# Altium PCB SW.PcbDoc (part 1 of 2)
Units mm, origin at the board's own origin, x right, y up, seen from the top; angles counter-clockwise.
Board outline 130 x 71 mm, 4 copper layers (Top Layer, Mid Layer 1, Mid Layer 2, Bottom Layer), stack 0.97 mm thick; 152 components, 272 nets, 858 pads, 548 vias.
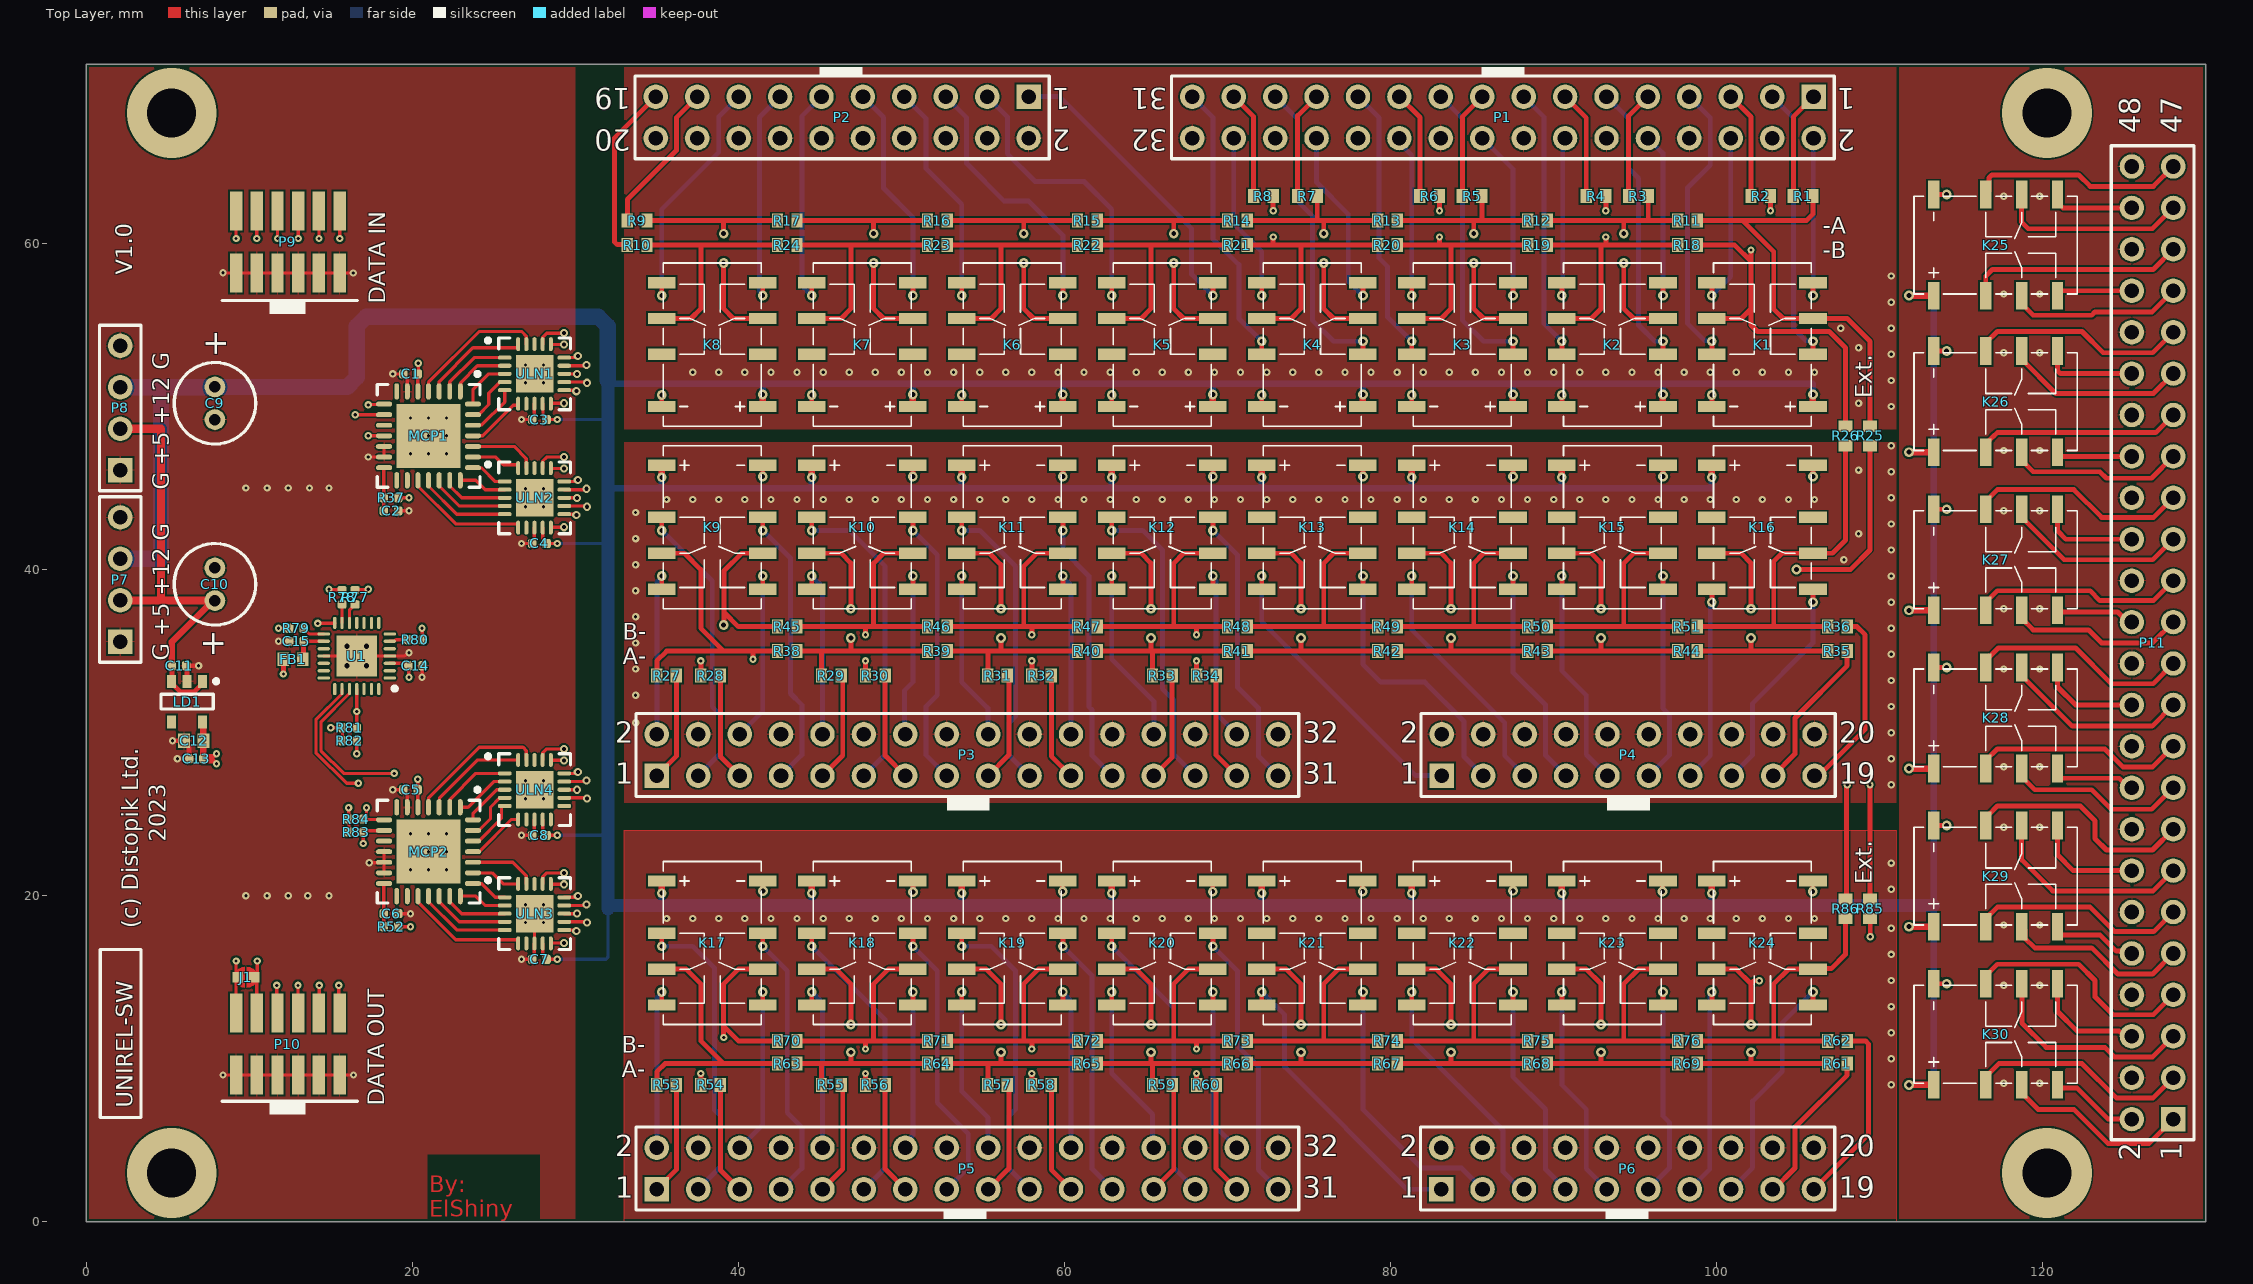
[diagram p0: Top Layer view]
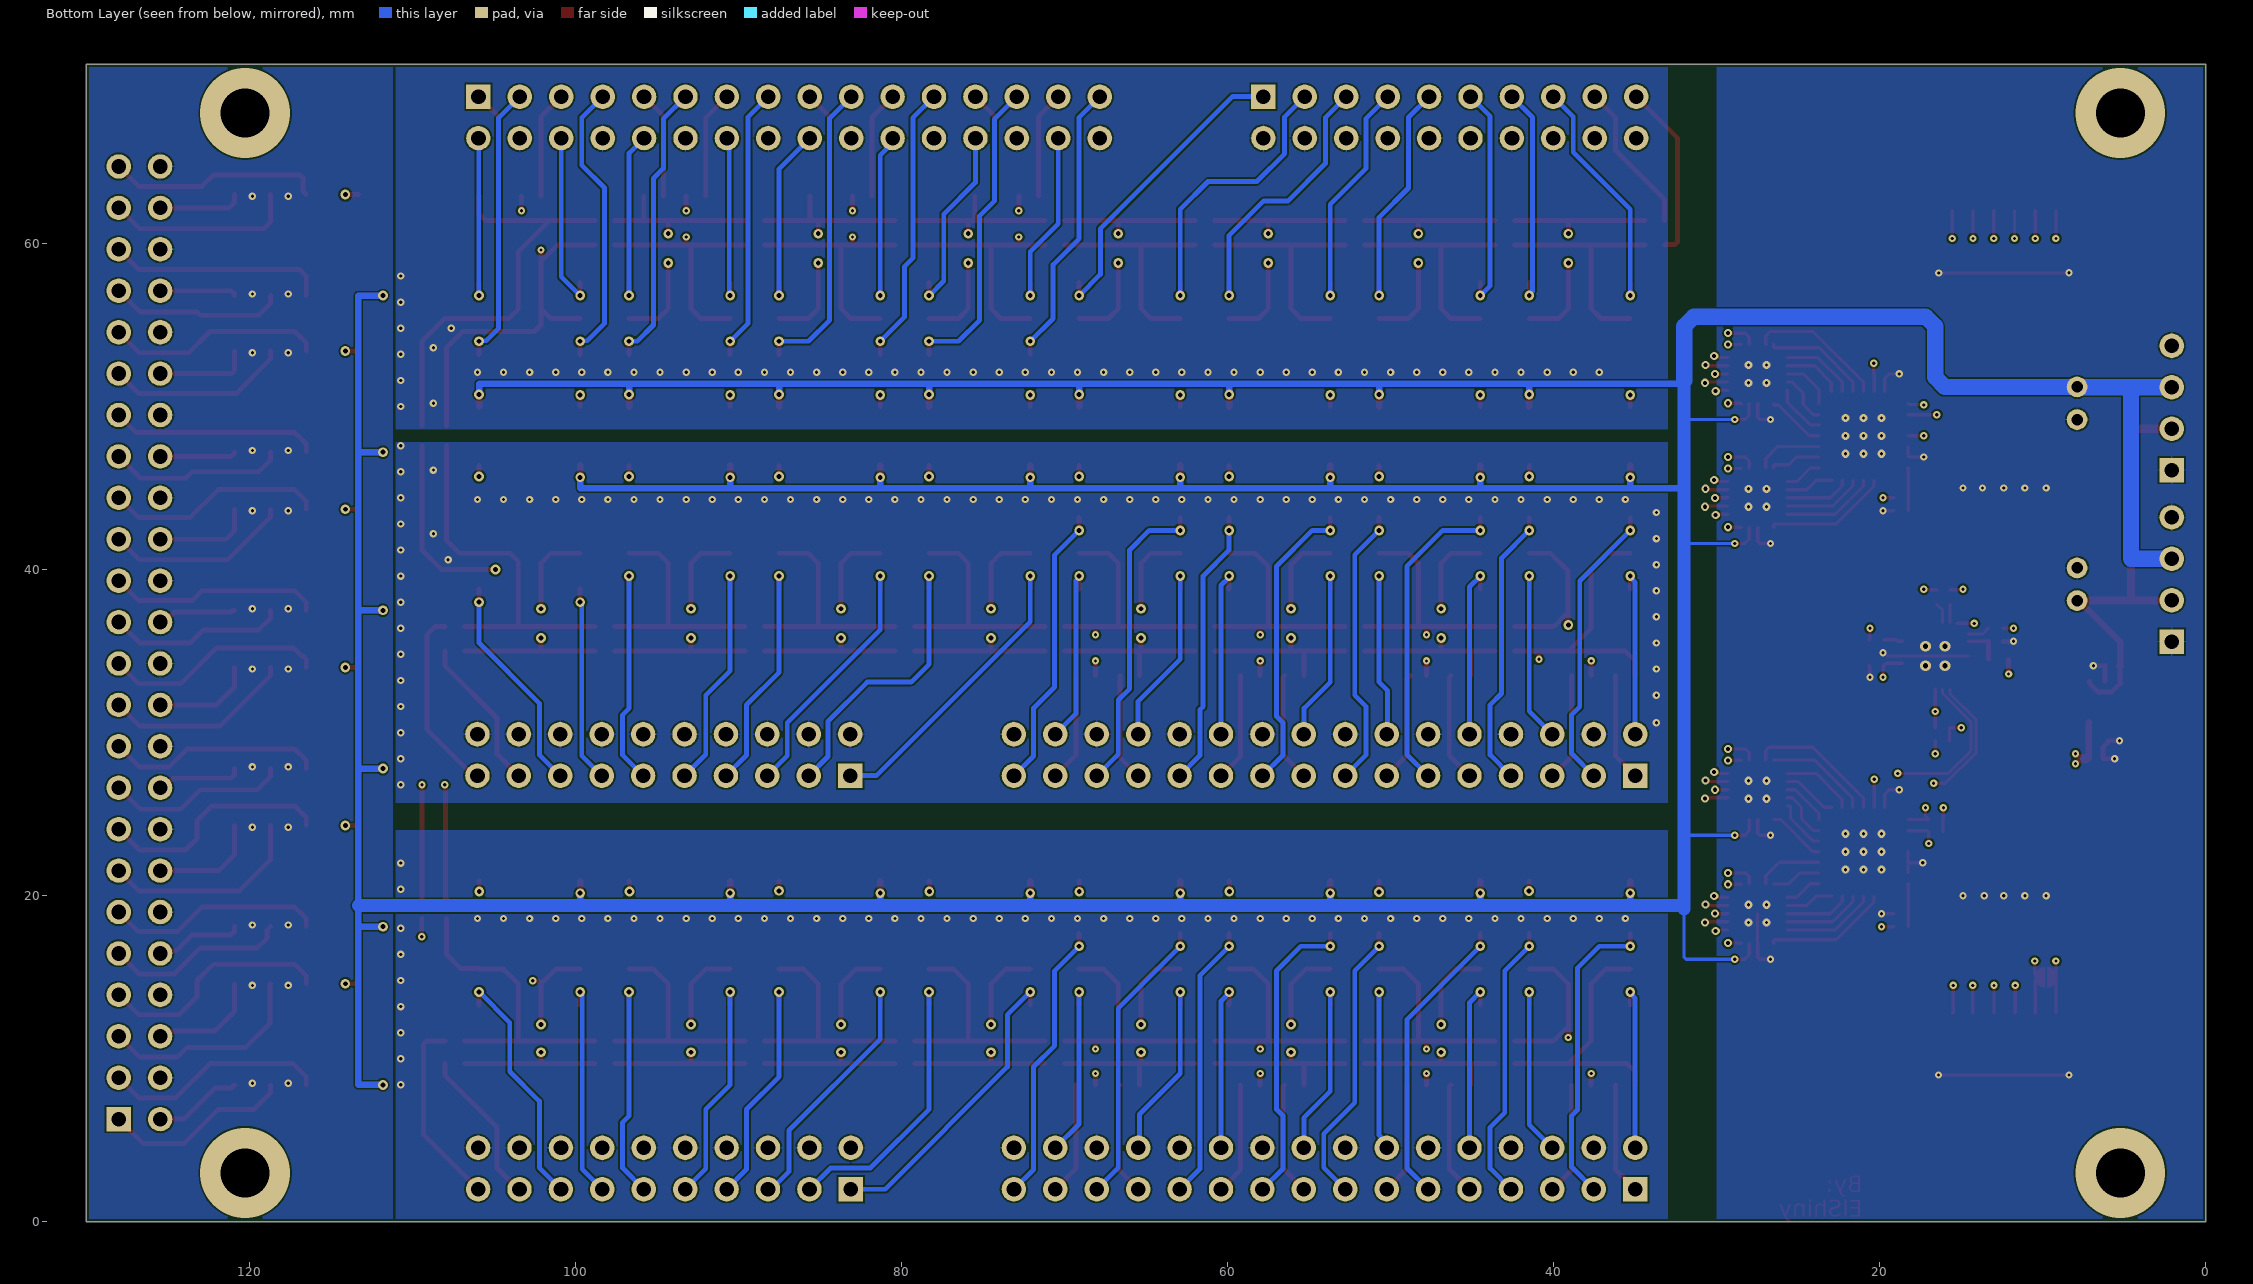
[diagram p1: Bottom Layer view, seen from below]
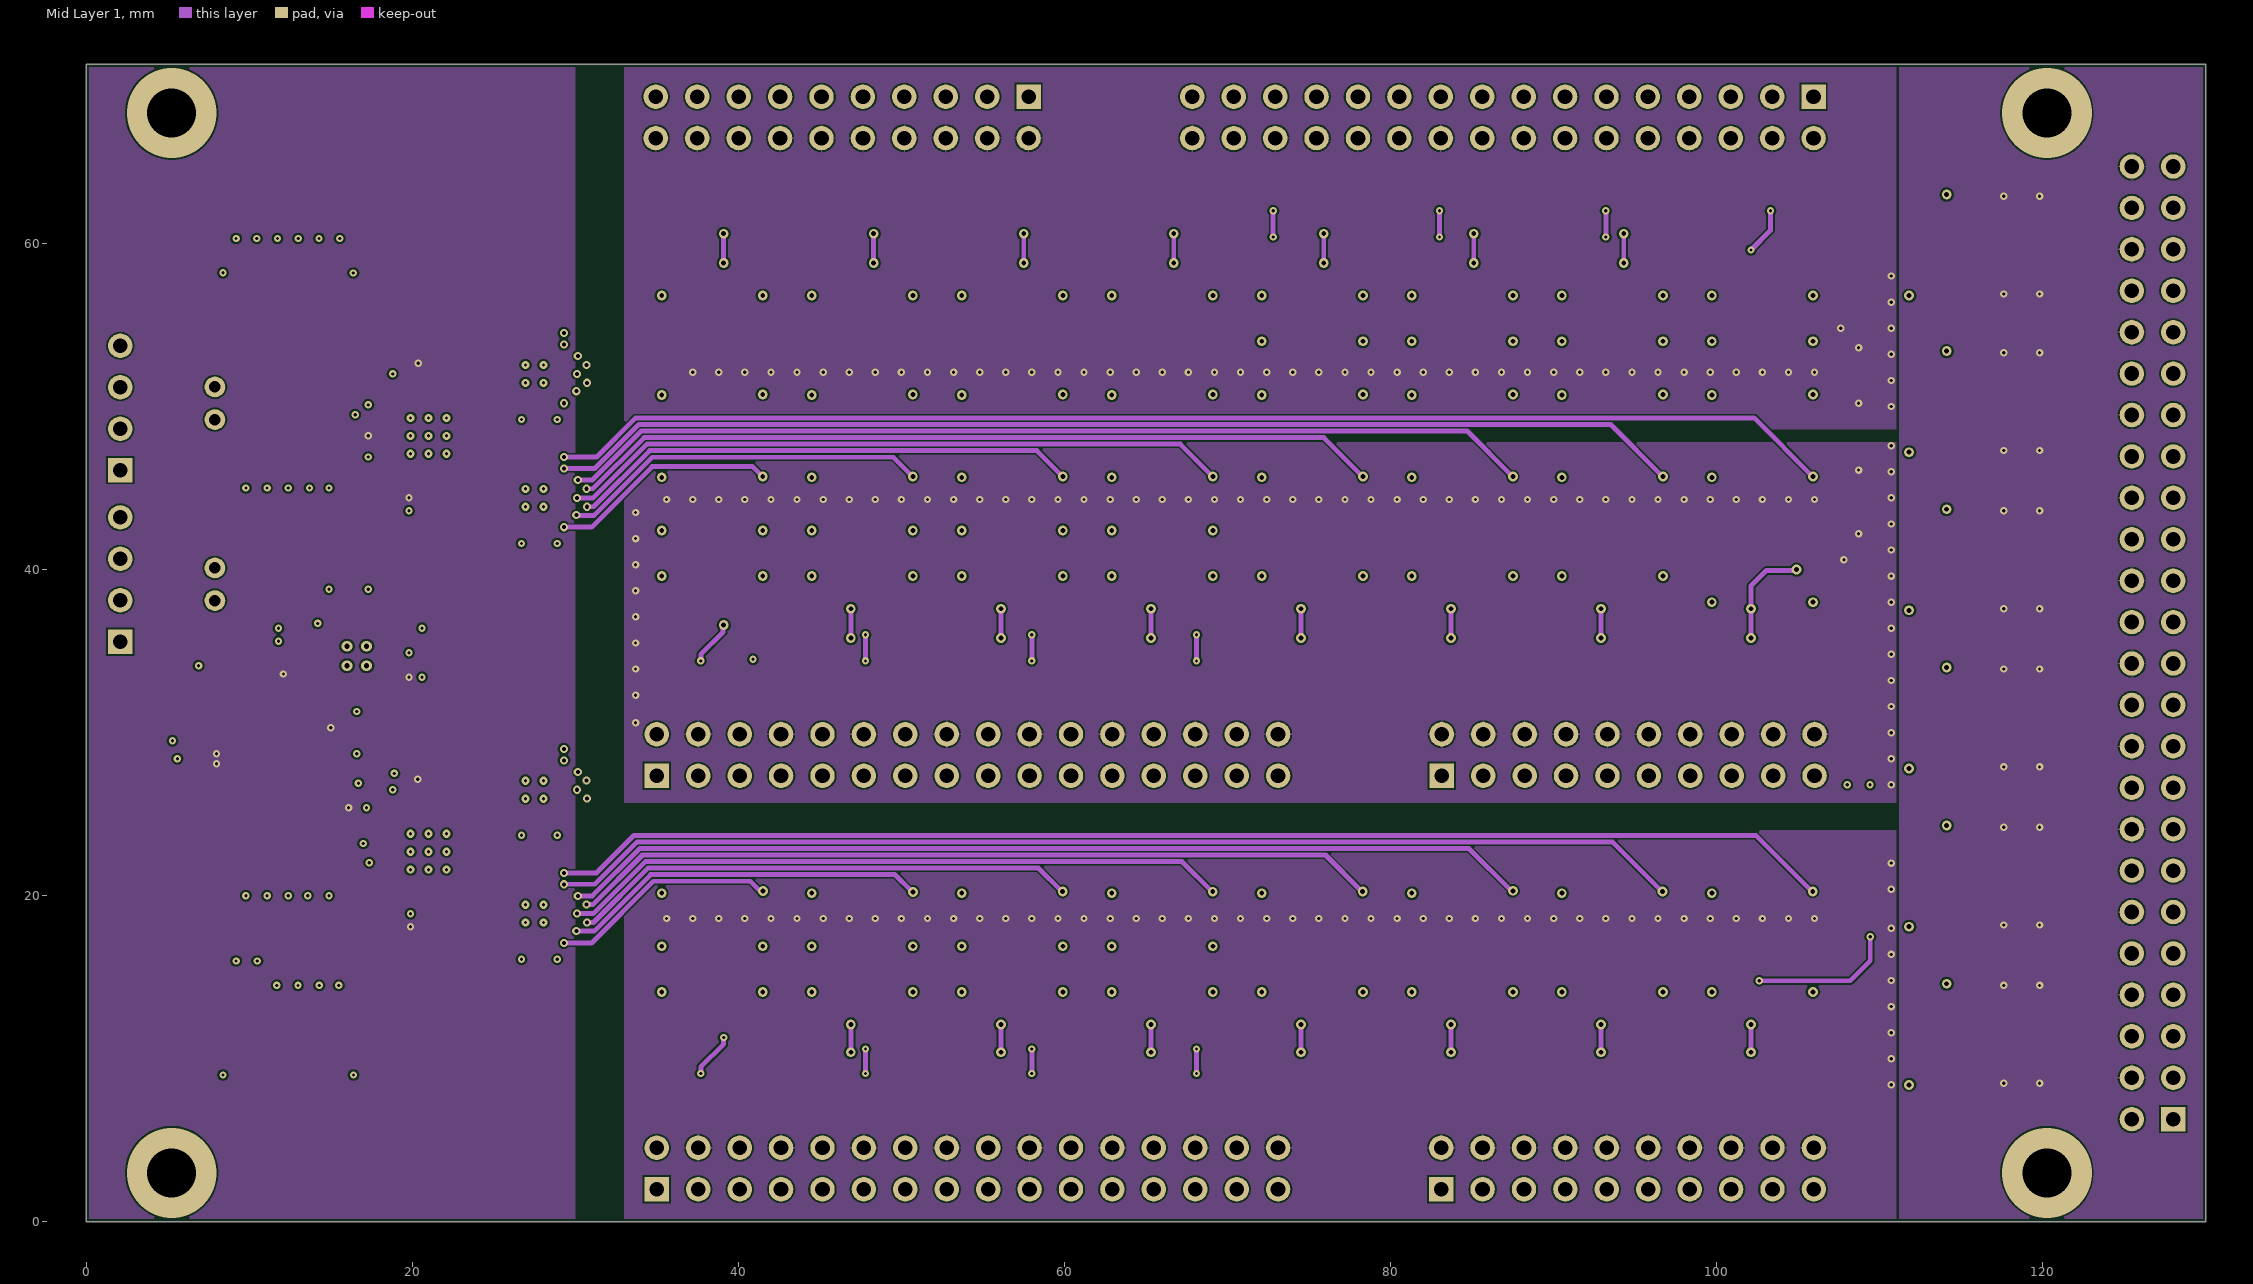
[diagram p2: Mid Layer 1]
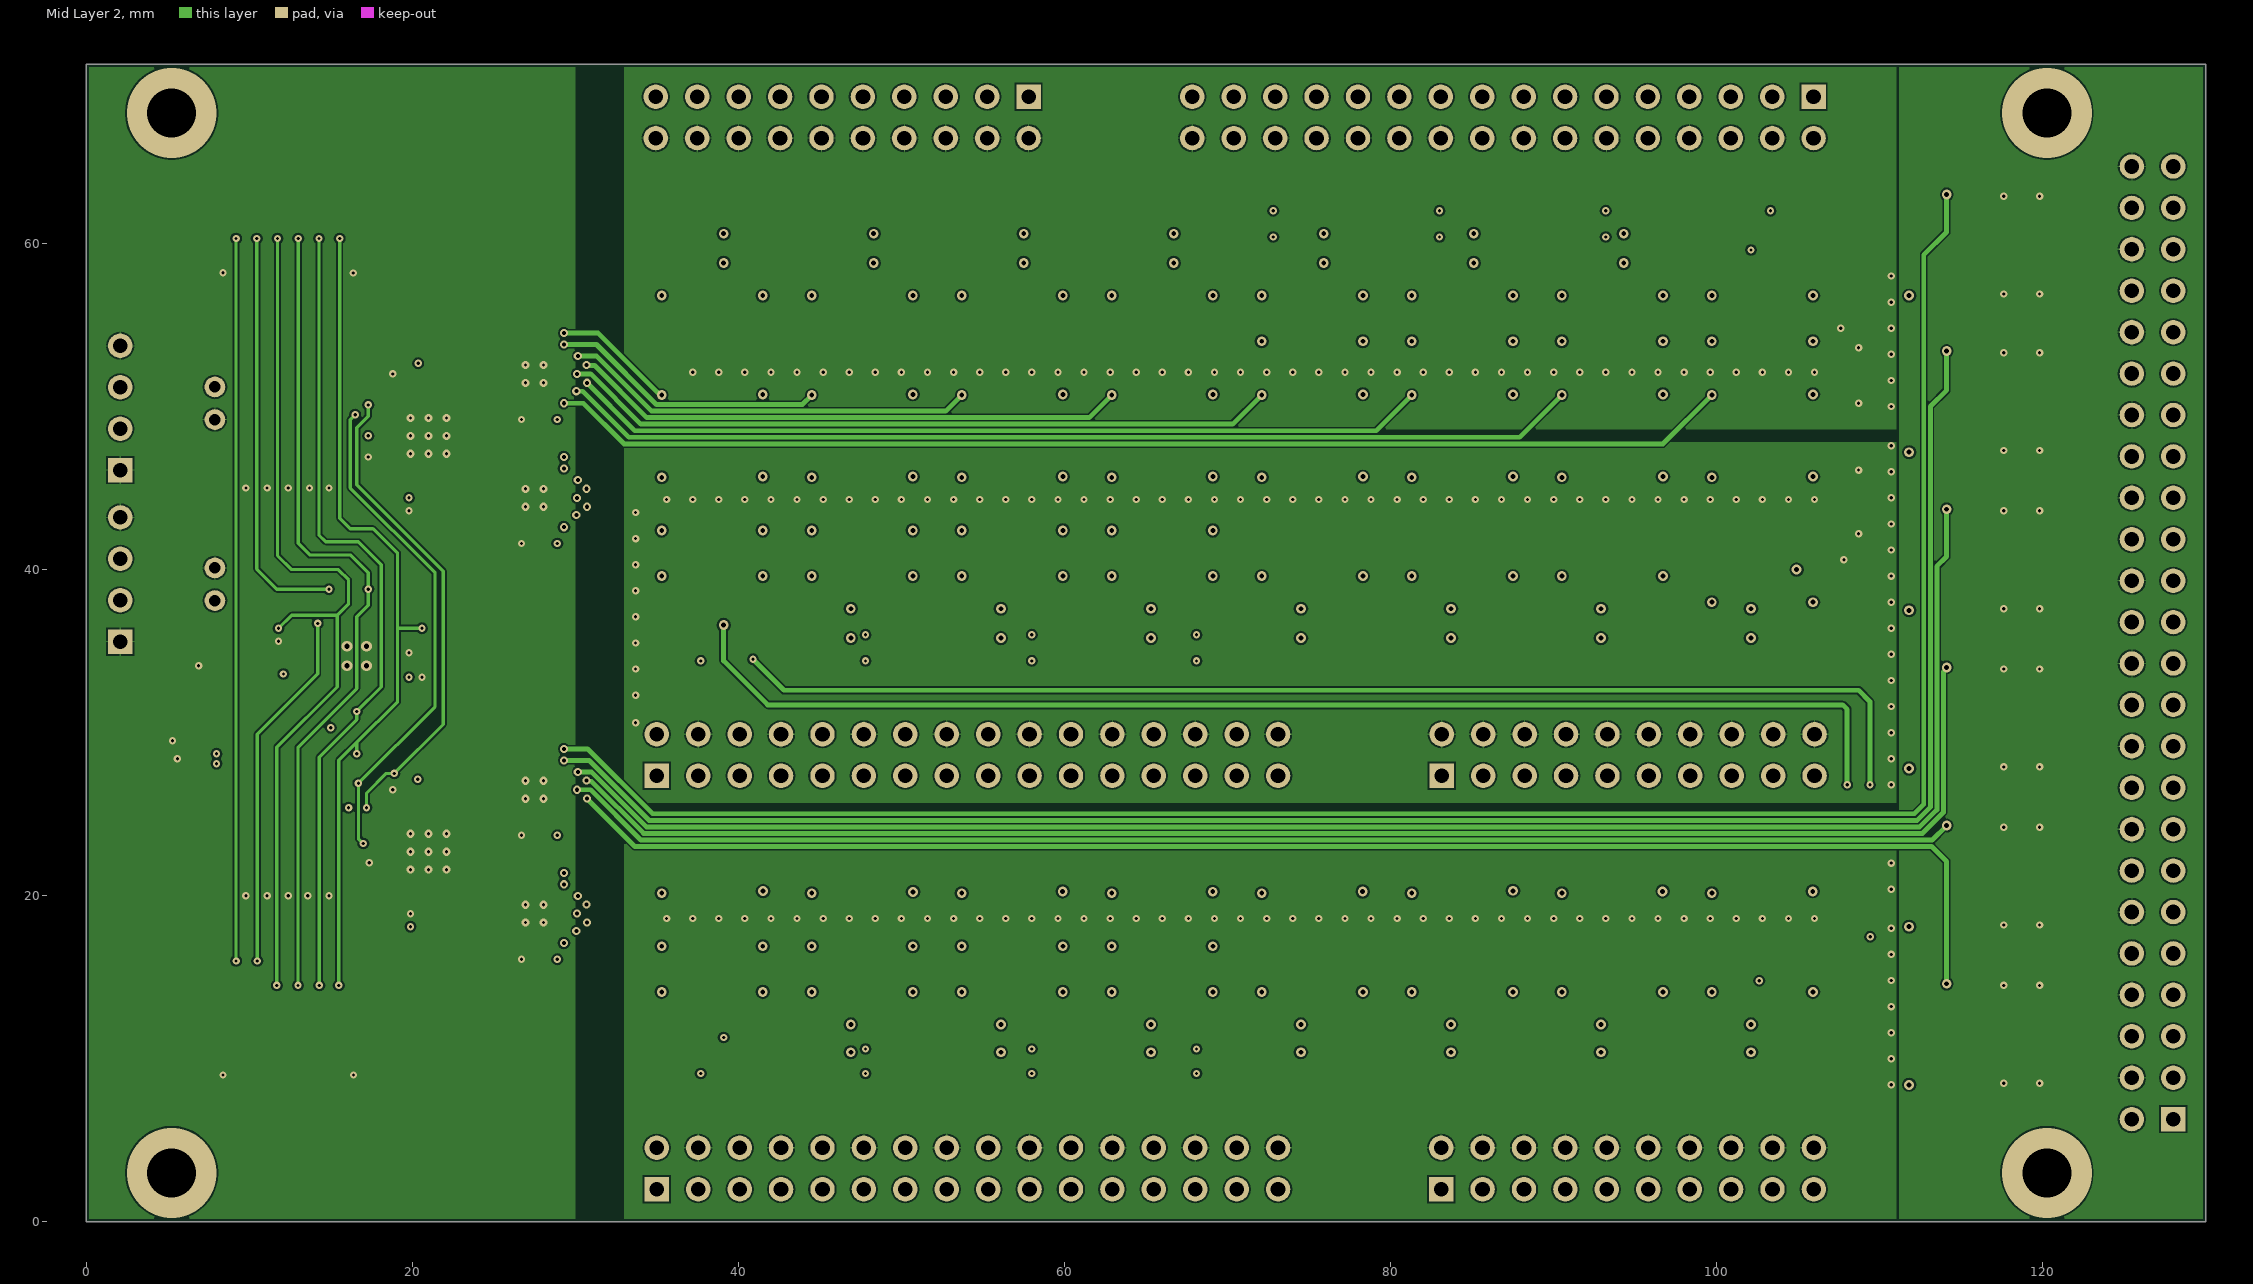
[diagram p3: Mid Layer 2]
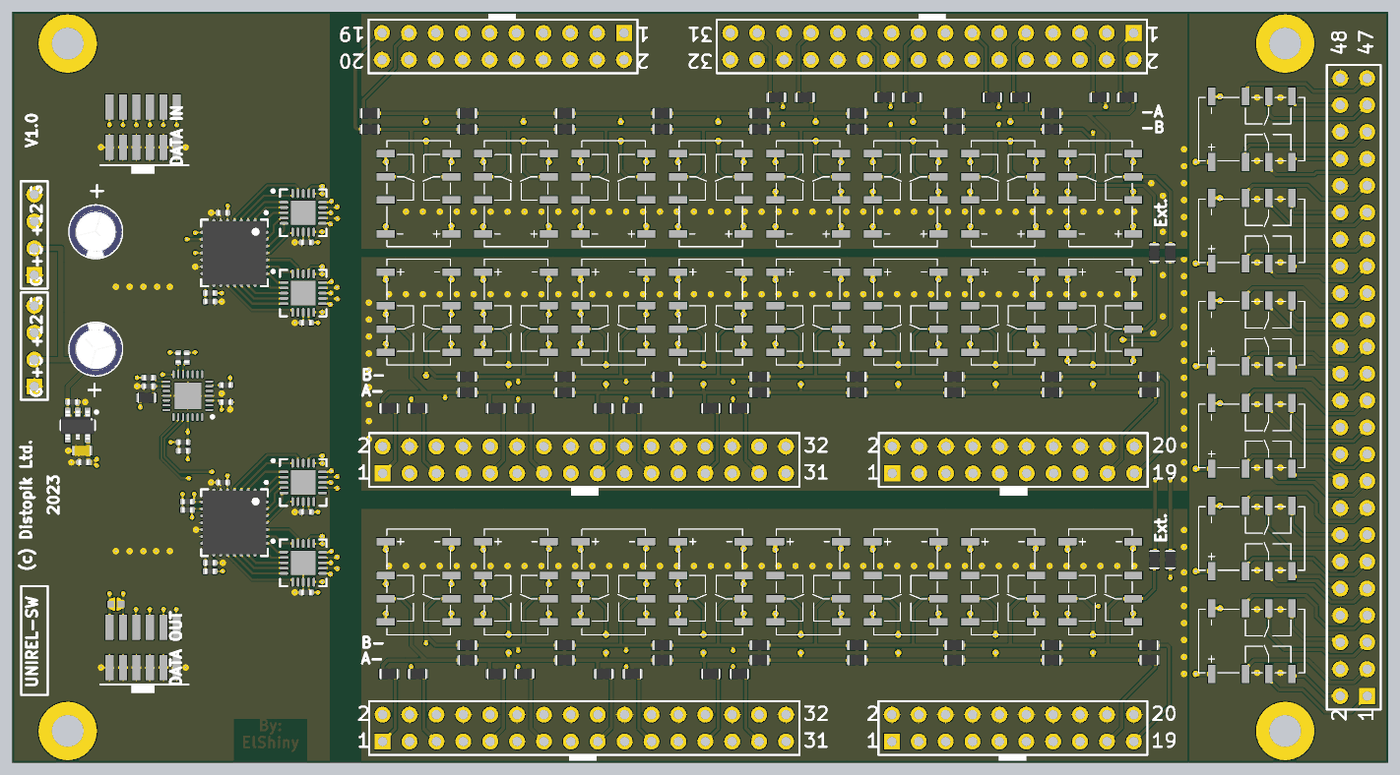
[diagram p5: 3D render of the assembled board from above, using the file's embedded part models]

## Layer stack, top to bottom
Top Solder: solder mask 0.0127, Solder Resist, Dk 3.8
Top Layer: signal copper 0.035
Dielectric 1: prepreg 0.1, 2313, Dk 4.05
Mid Layer 1: signal copper 0.0175
Core: core 0.665, FR-4, Dk 4.5
Mid Layer 2: signal copper 0.0175
Dielectric 2: prepreg 0.1, 2313, Dk 4.05
Bottom Layer: signal copper 0.035
Bottom Solder: solder mask 0.0127, Solder Resist, Dk 3.8

## Board outline
0,0 0,71 130,71 130,0

## Design rules (kind name [scope] priority, off if disabled: settings)
BoardOutlineClearance [All] p1: gap=0.2 ignorepadtopadclearanceinfootprint=FALSE
Clearance [All] p1: gap=0.102 ignorepadtopadclearanceinfootprint=FALSE except(0.127: Arc-Via Track-Via SMDPad-Via THPad-Via Via-Via Via-Fill Via-Poly Via-Region Via-Text; 0.25: Arc-Hole Track-Hole SMDPad-Hole THPad-Hole Via-Hole Fill-Hole Poly-Hole Region-Hole Text-Hole)
ComponentClearance [All] p1: gap=0.102 collisioncheckmode=3 verticalgap=0.102 showdistances=TRUE
DiffPairsRouting [All] p1: maxlimit=0.102 minlimit=0.102 mostfreqgap=0.102 toplayer_minwidth=0.102 toplayer_maxwidth=1816.048 toplayer_prefwidth=0.102 midlayer1_minwidth=0.102 midlayer1_maxwidth=1816.048 midlayer1_prefwidth=0.102 midlayer2_minwidth=0.102 midlayer2_maxwidth=1816.048 midlayer2_prefwidth=0.102 bottomlayer_minwidth=0.102 bottomlayer_maxwidth=1816.048 bottomlayer_prefwidth=0.102 maxuncoupledlength=12.7
Height [All] p1: minheight=0 maxheight=1816.048 prefheight=12.7
HoleSize [All] p1: absolutevalues=TRUE maxlimit=6.3 minlimit=0.2 maxpercent=80.000 minpercent=20.000
HoleToHoleClearance [All] p1: gap=0.25 allowstackedmicrovias=FALSE
MinimumAnnularRing [All] p1: minimumring=0.076
MinimumSolderMaskSliver [All] p1: minsoldermaskwidth=0
PlaneClearance [All] p1: clearance=0.102
PlaneConnect PlaneConnectPowerPads [InPadClass('PowerPads')] p1: planeconnectstyle=Direct reliefexpansion=0.508 reliefentries=4 reliefconductorwidth=0.254 reliefairgap=0.254
PlaneConnect [All] p2: pad.planeconnectstyle=Relief pad.reliefexpansion=0.3 pad.reliefentries=4 pad.reliefconductorwidth=0.102 pad.reliefairgap=0.102 via.planeconnectstyle=Direct via.reliefexpansion=0.3 via.reliefentries=4 via.reliefconductorwidth=0.127 via.reliefairgap=0.127
PolygonConnect PolygonConnectPowerPads [All vs (InPadClass('PowerPads'))] p1: connectstyle=Direct reliefconductorwidth=0.254 reliefentries=4 polygonreliefangle="90 Angle" airgapwidth=0.254
PolygonConnect [All] p2: thpad.connectstyle=Relief thpad.reliefconductorwidth=0.102 thpad.reliefentries=4 thpad.polygonreliefangle="90 Angle" thpad.airgapwidth=0.102 smdpad.connectstyle=Relief smdpad.reliefconductorwidth=0.102 smdpad.reliefentries=4 smdpad.polygonreliefangle="90 Angle" smdpad.airgapwidth=0.102 via.connectstyle=Direct via.reliefconductorwidth=0.127 via.reliefentries=4 via.polygonreliefangle="90 Angle" via.airgapwidth=0.127
RoutingVias [All] p1: holewidth=0.2 width=0.45 viastyle="Through Hole" minholewidth=0.2 minwidth=0.45 maxholewidth=6.3 maxwidth=6.55
SilkToSilkClearance [All] p1: silktosilkclearance=0
SilkToSolderMaskClearance [IsPad] p1: minsilkscreentomaskgap=0.102 clearancetoexposedcopper=TRUE
SolderMaskExpansion [All] p1: expansion=0.075 istentingtop=FALSE
Width [All] p1: maxlimit=1816.048 minlimit=0.102 preferedwidth=0.102
20 further rules are at their usual default settings.

## Components (designator, comment, footprint, x,y, rotation, side; value= is the part's Value field where it differs from the comment)
C1 "100n" R1005_0402i_L 19.9,52 r0 top
C2 "100n" R1005_0402i_L 18.7,43.6 r180 top
C3 "100n" R1005_0402i_L 27.8,49.2 r180 top
C4 "100n" R1005_0402i_L 27.8,41.6 r180 top
C5 "100n" R1005_0402i_L 19.9,26.5 r0 top
C6 "100n" R1005_0402i_L 18.7,18.9 r180 top
C7 "100n" R1005_0402i_L 27.8,16.1 r180 top
C8 "100n" R1005_0402i_L 27.8,23.7 r180 top
C9 "C+" "C AlElko 5x11 R2" 7.9,50.2 r90 top
C10 "C+" "C AlElko 5x11 R2" 7.9,39.1 r270 top
C11 "100n" R1005_0402i_L 5.7,34.1 r0 top
C12 "1u" C1608_0603I_L 6.6,29.5 r180 top
C13 "100n" R1005_0402i_L 6.76,28.4 r180 top
C14 "100n" R1005_0402i_L 20.2,34.1 r0 top
C15 "100n" R1005_0402i_L 12.9,35.6 r180 top
FB1 "FERITTE BEAD" R1608_0603I_L 12.7,34.5 r0 top
J1 "Terminator" solderJumper 9.8,15 r0 top
K1 "DPDT" "AXICOM IM-G Relay" 102.8,53.8 r90 top locked
K2 "DPDT" "AXICOM IM-G Relay" 93.6,53.8 r90 top locked
K3 "DPDT" "AXICOM IM-G Relay" 84.4,53.8 r90 top locked
K4 "DPDT" "AXICOM IM-G Relay" 75.2,53.8 r90 top locked
K5 "DPDT" "AXICOM IM-G Relay" 66,53.8 r90 top locked
K6 "DPDT" "AXICOM IM-G Relay" 56.8,53.8 r90 top locked
K7 "DPDT" "AXICOM IM-G Relay" 47.6,53.8 r90 top locked
K8 "DPDT" "AXICOM IM-G Relay" 38.4,53.8 r90 top locked
K9 "DPDT" "AXICOM IM-G Relay" 38.4,42.6 r270 top locked
K10 "DPDT" "AXICOM IM-G Relay" 47.6,42.6 r270 top locked
K11 "DPDT" "AXICOM IM-G Relay" 56.8,42.6 r270 top locked
K12 "DPDT" "AXICOM IM-G Relay" 66,42.6 r270 top locked
K13 "DPDT" "AXICOM IM-G Relay" 75.2,42.6 r270 top locked
K14 "DPDT" "AXICOM IM-G Relay" 84.4,42.6 r270 top locked
K15 "DPDT" "AXICOM IM-G Relay" 93.6,42.6 r270 top locked
K16 "DPDT" "AXICOM IM-G Relay" 102.8,42.6 r270 top locked
K17 "DPDT" "AXICOM IM-G Relay" 38.4,17.1 r270 top locked
K18 "DPDT" "AXICOM IM-G Relay" 47.6,17.1 r270 top locked
K19 "DPDT" "AXICOM IM-G Relay" 56.8,17.1 r270 top locked
K20 "DPDT" "AXICOM IM-G Relay" 66,17.1 r270 top locked
K21 "DPDT" "AXICOM IM-G Relay" 75.2,17.1 r270 top locked
K22 "DPDT" "AXICOM IM-G Relay" 84.4,17.1 r270 top locked
K23 "DPDT" "AXICOM IM-G Relay" 93.6,17.1 r270 top locked
K24 "DPDT" "AXICOM IM-G Relay" 102.8,17.1 r270 top locked
K25 "DPDT" "AXICOM IM-G Relay" 117.1,59.9 r0 top locked
K26 "DPDT" "AXICOM IM-G Relay" 117.1,50.3 r0 top locked
K27 "DPDT" "AXICOM IM-G Relay" 117.1,40.6 r0 top locked
K28 "DPDT" "AXICOM IM-G Relay" 117.1,30.9 r0 top locked
K29 "DPDT" "AXICOM IM-G Relay" 117.1,21.2 r0 top locked
K30 "DPDT" "AXICOM IM-G Relay" 117.1,11.5 r0 top locked
LD1 "NCP115 3.3V" TSOP95P280X110-6L 6.2,31.9 r270 top
MCP1 "MCP32017" "MCP23017 QFN" 21,48.2 r270 top
MCP2 "MCP32017" "MCP23017 QFN" 21,22.7 r270 top
P1 "Header 16X2" HDR2X16 105.94,69 r180 top locked
P2 "Header 10X2" HDR2X10 57.8,69 r180 top locked
P3 "Header 16X2" HDR2X16 35,27.36 r0 top locked
P4 "Header 10X2" HDR2X10 83.14,27.36 r0 top locked
P5 "Header 16X2" HDR2X16 35,2 r0 top locked
P6 "Header 10X2" HDR2X10 83.1,2 r0 top locked
P7 "PWR" HDR1X4 2.1,35.58 r90 top
P8 "PWR" HDR1X4 2.1,46.1 r90 top
P9 "Input" "1.27mm SMD conn" 12.375,60.095 r180 top
P10 "Output" "1.27mm SMD conn" 12.375,10.905 r180 top
P11 "Header 24X2" HDR2X24 128,6.3 r90 top locked
R1 "R" R1608_0603I_L 105.3,62.9 r180 top
R2 "R" R1608_0603I_L 102.7,62.9 r180 top
R3 "R" R1608_0603I_L 95.2,62.9 r180 top
R4 "R" R1608_0603I_L 92.6,62.9 r180 top
R5 "R" R1608_0603I_L 85,62.9 r180 top
R6 "R" R1608_0603I_L 82.4,62.9 r180 top
R7 "R" R1608_0603I_L 74.9,62.9 r180 top
R8 "R" R1608_0603I_L 72.2,62.9 r180 top
R9 "R" R1608_0603I_L 33.8,61.4 r180 top
R10 "R" R1608_0603I_L 33.8,59.9 r180 top
R11 "R" R1608_0603I_L 98.2,61.4 r180 top
R12 "R" R1608_0603I_L 89,61.4 r180 top
R13 "R" R1608_0603I_L 79.8,61.4 r180 top
R14 "R" R1608_0603I_L 70.6,61.4 r180 top
R15 "R" R1608_0603I_L 61.4,61.4 r180 top
R16 "R" R1608_0603I_L 52.2,61.4 r180 top
R17 "R" R1608_0603I_L 43,61.4 r180 top
R18 "R" R1608_0603I_L 98.2,59.9 r180 top
R19 "R" R1608_0603I_L 89,59.9 r180 top
R20 "R" R1608_0603I_L 79.8,59.9 r180 top
R21 "R" R1608_0603I_L 70.6,59.9 r180 top
R22 "R" R1608_0603I_L 61.4,59.9 r180 top
R23 "R" R1608_0603I_L 52.2,59.9 r180 top
R24 "R" R1608_0603I_L 43,59.9 r180 top
R25 "R" R1608_0603I_L 109.4,48.2 r90 top
R26 "R" R1608_0603I_L 107.9,48.2 r90 top
R27 "R" R1608_0603I_L 35.6,33.5 r0 top
R28 "R" R1608_0603I_L 38.3,33.5 r0 top
R29 "R" R1608_0603I_L 45.7,33.5 r0 top
R30 "R" R1608_0603I_L 48.4,33.5 r0 top
R31 "R" R1608_0603I_L 55.9,33.5 r0 top
R32 "R" R1608_0603I_L 58.6,33.5 r0 top
R33 "R" R1608_0603I_L 66,33.5 r0 top
R34 "R" R1608_0603I_L 68.7,33.5 r0 top
R35 "R" R1608_0603I_L 107.4,35 r0 top
R36 "R" R1608_0603I_L 107.4,36.5 r0 top
R37 "100k" R1005_0402i_L 18.7,44.4 r180 top
R38 "R" R1608_0603I_L 43,35 r0 top
R39 "R" R1608_0603I_L 52.2,35 r0 top
R40 "R" R1608_0603I_L 61.4,35 r0 top
R41 "R" R1608_0603I_L 70.6,35 r0 top
R42 "R" R1608_0603I_L 79.8,35 r0 top
R43 "R" R1608_0603I_L 89,35 r0 top
R44 "R" R1608_0603I_L 98.2,35 r0 top
R45 "R" R1608_0603I_L 43,36.5 r0 top
R46 "R" R1608_0603I_L 52.2,36.5 r0 top
R47 "R" R1608_0603I_L 61.4,36.5 r0 top
R48 "R" R1608_0603I_L 70.6,36.5 r0 top
R49 "R" R1608_0603I_L 79.8,36.5 r0 top
R50 "R" R1608_0603I_L 89,36.5 r0 top
R51 "R" R1608_0603I_L 98.2,36.5 r0 top
R52 "100k" R1005_0402i_L 18.7,18.1 r180 top
R53 "R" R1608_0603I_L 35.6,8.4 r0 top
R54 "R" R1608_0603I_L 38.3,8.4 r0 top
R55 "R" R1608_0603I_L 45.7,8.4 r0 top
R56 "R" R1608_0603I_L 48.4,8.4 r0 top
R57 "R" R1608_0603I_L 55.9,8.4 r0 top
R58 "R" R1608_0603I_L 58.6,8.4 r0 top
R59 "R" R1608_0603I_L 66,8.4 r0 top
R60 "R" R1608_0603I_L 68.7,8.4 r0 top
R61 "R" R1608_0603I_L 107.4,9.7 r0 top
R62 "R" R1608_0603I_L 107.4,11.1 r0 top
R63 "R" R1608_0603I_L 43,9.7 r0 top
R64 "R" R1608_0603I_L 52.2,9.7 r0 top
R65 "R" R1608_0603I_L 61.4,9.7 r0 top
R66 "R" R1608_0603I_L 70.6,9.7 r0 top
R67 "R" R1608_0603I_L 79.8,9.7 r0 top
R68 "R" R1608_0603I_L 89,9.7 r0 top
R69 "R" R1608_0603I_L 98.2,9.7 r0 top
R70 "R" R1608_0603I_L 43,11.1 r0 top
R71 "R" R1608_0603I_L 52.2,11.1 r0 top
R72 "R" R1608_0603I_L 61.4,11.1 r0 top
R73 "R" R1608_0603I_L 70.6,11.1 r0 top
R74 "R" R1608_0603I_L 79.8,11.1 r0 top
R75 "R" R1608_0603I_L 89,11.1 r0 top
R76 "R" R1608_0603I_L 98.2,11.1 r0 top
R77 "500" R1005_0402i_L 16.5,38.3 r270 top
R78 "500" R1005_0402i_L 15.7,38.3 r270 top
R79 "500" R1005_0402i_L 12.9,36.4 r0 top
R80 "500" R1005_0402i_L 20.2,35.7 r180 top
R81 "100k" R1005_0402i_L 16.16,30.3 r0 top
R82 "100k" R1005_0402i_L 16.16,29.5 r0 top
R83 "10k" R1005_0402i_L 16.56,23.9 r0 top
R84 "10k" R1005_0402i_L 16.56,24.7 r0 top
R85 "R" R1608_0603I_L 109.4,19.2 r90 top
R86 "R" R1608_0603I_L 107.9,19.2 r90 top
U1 "ATtiny88-MMU" 28M1_N 16.6,34.7 r180 top
ULN1 "ULN2803" QFN127P600-8N 27.5,52 r0 top
ULN2 "ULN2803" QFN127P600-8N 27.5,44.4 r0 top
ULN3 "ULN2803" QFN127P600-8N 27.5,18.9 r0 top
ULN4 "ULN2803" QFN127P600-8N 27.5,26.5 r0 top

## Footprints (in the part's own frame and the unit in brackets; to place one, negate y for a bottom-side part, rotate by r counter-clockwise, add the part's x,y. Pads: shape width x height; smd on the part's side, far side on the other; paste and mask are expansions set on the pad)
"1.27mm SMD conn" [mm]
  rect 0.76x2.4 smd: 1(3.175,1.905) 2(3.175,-1.905) 3(1.905,1.905) 4(1.905,-1.905) 5(0.635,1.905) 6(0.635,-1.905) 7(-0.635,1.905) 8(-0.635,-1.905) 9(-1.905,1.905) 10(-1.905,-1.905) 11(-3.175,1.905) 12(-3.175,-1.905)
28M1_N [mm]
  oval 0.75x0.2 smd: 1(-2.025,1.35) 2(-2.025,0.9) 3(-2.025,0.45) 4(-2.025,0) 5(-2.025,-0.45) 6(-2.025,-0.9) 7(-2.025,-1.35) 15(2.025,-1.35) 16(2.025,-0.9) 17(2.025,-0.45) 18(2.025,0) 19(2.025,0.45) 20(2.025,0.9) 21(2.025,1.35)
  oval 0.2x0.75 smd: 8(-1.35,-2.025) 9(-0.9,-2.025) 10(-0.45,-2.025) 11(0,-2.025) 12(0.45,-2.025) 13(0.9,-2.025) 14(1.35,-2.025) 22(1.35,2.025) 23(0.9,2.025) 24(0.45,2.025) 25(0,2.025) 26(-0.45,2.025) 27(-0.9,2.025) 28(-1.35,2.025)
  rect 2.5x2.5 smd: 29(0,0)
  silkscreen extent -2.45,1.88 -2.2,2.12, body extent -2.02,-2.02 2.02,2.02, height 1
"AXICOM IM-G Relay" [mm] "TE CONNECTIVITY AXICOM IM-G (Gull wings) Relay SMD"
  rect 0.7x1.7 smd: 1(-3.8,-3.1) 2(-0.6,-3.1) 3(1.6,-3.1) 4(3.8,-3.1) 5(3.8,3.1) 6(1.6,3.1) 7(-0.6,3.1) 8(-3.8,3.1)
  silkscreen extent -5,-3 5,3
C1608_0603I_L [mm] "Chip Capacitor, 2-Leads, Body 1.57x0.85mm, IPC High Density"
  rect 0.72x0.9 smd: 1(-0.6,0) 2(0.6,0)
  body extent -0.83,-0.48 0.82,0.48, height 0.95
"C AlElko 5x11 R2" [mm]
  round 1.27 hole 0.711: 1(1,0) 2(-1,0)
  silkscreen extent -2.5,-2.5 2.5,2.5, body extent -2.5,-2.5 2.5,2.5, height 11.01
HDR1X4 [mm] "Connector; Header; 4 Position"
  rect 1.5x1.5 hole 0.9: 1(0,0)
  round 1.5 hole 0.9: 2(2.54,0) 3(5.08,0) 4(7.62,0)
  silkscreen extent -1.27,-1.27 8.89,1.27
HDR2X10 [mm] "Connector; Header; 10x2 Position"
  rect 1.5x1.5 hole 0.9: 1(0,0)
  round 1.5 hole 0.9: 2(0,2.54) 3(2.54,0) 4(2.54,2.54) 5(5.08,0) 6(5.08,2.54) 7(7.62,0) 8(7.62,2.54) 9(10.16,0) 10(10.16,2.54) 11(12.7,0) 12(12.7,2.54) 13(15.24,0) 14(15.24,2.54) 15(17.78,0) 16(17.78,2.54) 17(20.32,0) 18(20.32,2.54) 19(22.86,0) 20(22.86,2.54)
  silkscreen extent -1.27,-1.27 24.13,3.81
HDR2X16 [mm] "Connector; Header; 16x2 Position"
  rect 1.5x1.5 hole 0.9: 1(0,0)
  round 1.5 hole 0.9: 2(0,2.54) 3(2.54,0) 4(2.54,2.54) 5(5.08,0) 6(5.08,2.54) 7(7.62,0) 8(7.62,2.54) 9(10.16,0) 10(10.16,2.54) 11(12.7,0) 12(12.7,2.54) 13(15.24,0) 14(15.24,2.54) 15(17.78,0) 16(17.78,2.54) 17(20.32,0) 18(20.32,2.54) 19(22.86,0) 20(22.86,2.54) 21(25.4,0) 22(25.4,2.54) 23(27.94,0) 24(27.94,2.54) 25(30.48,0) 26(30.48,2.54) 27(33.02,0) 28(33.02,2.54) 29(35.56,0) 30(35.56,2.54) 31(38.1,0) 32(38.1,2.54)
  silkscreen extent -1.27,-1.27 39.37,3.81
HDR2X24 [mm] "Connector; Header; 24x2 Position"
  rect 1.5x1.5 hole 0.9: 1(0,0)
  round 1.5 hole 0.9: 2(0,2.54) 3(2.54,0) 4(2.54,2.54) 5(5.08,0) 6(5.08,2.54) 7(7.62,0) 8(7.62,2.54) 9(10.16,0) 10(10.16,2.54) 11(12.7,0) 12(12.7,2.54) 13(15.24,0) 14(15.24,2.54) 15(17.78,0) 16(17.78,2.54) 17(20.32,0) 18(20.32,2.54) 19(22.86,0) 20(22.86,2.54) 21(25.4,0) 22(25.4,2.54) 23(27.94,0) 24(27.94,2.54) 25(30.48,0) 26(30.48,2.54) 27(33.02,0) 28(33.02,2.54) 29(35.56,0) 30(35.56,2.54) 31(38.1,0) 32(38.1,2.54) 33(40.64,0) 34(40.64,2.54) 35(43.18,0) 36(43.18,2.54) 37(45.72,0) 38(45.72,2.54) 39(48.26,0) 40(48.26,2.54) 41(50.8,0) 42(50.8,2.54) 43(53.34,0) 44(53.34,2.54) 45(55.88,0) 46(55.88,2.54) 47(58.42,0) 48(58.42,2.54)
  silkscreen extent -1.27,-1.27 59.69,3.81
"MCP23017 QFN" [mm] "QFN, 28-Leads, Body 6,00x6,00mm, Pitch 0,65mm, Thermal Pad 3,93x3,93mm, IPC High Density"
  oval 1x0.3 smd: 1(-2.725,1.95) 2(-2.725,1.3) 3(-2.725,0.65) 4(-2.725,0) 5(-2.725,-0.65) 6(-2.725,-1.3) 7(-2.725,-1.95) 15(2.725,-1.95) 16(2.725,-1.3) 17(2.725,-0.65) 18(2.725,0) 19(2.725,0.65) 20(2.725,1.3) 21(2.725,1.95)
  oval 0.3x1 smd: 8(-1.95,-2.725) 9(-1.3,-2.725) 10(-0.65,-2.725) 11(0,-2.725) 12(0.65,-2.725) 13(1.3,-2.725) 14(1.95,-2.725) 22(1.95,2.725) 23(1.3,2.725) 24(0.65,2.725) 25(0,2.725) 26(-0.65,2.725) 27(-1.3,2.725) 28(-1.95,2.725)
  rect 3.93x3.93 smd: 29(0,0)
  silkscreen extent -3.92,-3.15 3.15,3.15, body extent -3,-3 3,3, height 0.9
QFN127P600-8N [mm]
  oval 0.85x0.25 smd: 1(-1.825,1) 2(-1.825,0.5) 3(-1.825,0) 4(-1.825,-0.5) 5(-1.825,-1) 11(1.825,-1) 12(1.825,-0.5) 13(1.825,0) 14(1.825,0.5) 15(1.825,1)
  oval 0.25x0.85 smd: 6(-1,-1.825) 7(-0.5,-1.825) 8(0,-1.825) 9(0.5,-1.825) 10(1,-1.825) 16(1,1.825) 17(0.5,1.825) 18(0,1.825) 19(-0.5,1.825) 20(-1,1.825)
  rect 2.3x2.3 smd: 21(0,0)
  silkscreen extent -2.97,-2.2 2.2,2.2, body extent -2.05,-2.05 2.05,2.05, height 0.8
R1005_0402i_L [mm] "Resistor, Chip; 1.00 mm L X 0.50 mm W X 0.40 mm H body"
  rrect50% 0.52x0.56 smd: 1(-0.44,0) 2(0.44,0)
  body extent -0.5,-0.25 0.5,0.25, height 0.4
R1608_0603I_L [mm] "Chip Resistor, 2-Leads, Body 1.57x0.85mm, IPC High Density"
  rect 0.7x0.85 smd: 1(-0.6,0) 2(0.6,0)
  body extent -0.82,-0.48 0.82,0.48, height 0.5
solderJumper [mil]
  rect 25x25 smd: 1(20,0) 2(-20,0)
  Top Layer region: 2.51,25 12.08,23.1 20.19,17.68 25.61,9.57 27.51,0 27.51,0 25.61,-9.57 20.19,-17.68 12.08,-23.1 2.51,-25 2.51,-25
  Top Layer region: -2.51,25 -12.08,23.1 -20.19,17.68 -25.61,9.57 -27.51,0 -27.51,0 -25.61,-9.57 -20.19,-17.68 -12.08,-23.1 -2.51,-25 -2.51,-25
TSOP95P280X110-6L [mm]
  rect 0.8x0.55 smd: 1(-1.25,0.95) 2(-1.25,0) 3(-1.25,-0.95) 4(1.25,-0.95) 5(1.25,0.95)
  silkscreen extent -1.37,-1.6 0.45,1.9, body extent -1.38,-1.6 1.38,1.6, height 1.1

## Part data
C1 C2 C3 C4 C5 C6 C7 C8 C11 C12 C13 C14 C15: library part C, "Capacitor"
C9 C10: "Capacitor Polarized"
J1: library part JMP_mini
K1 K2 K3 K4 K5 K6 K7 K8 K9 K10 K11 K12 K13 K14 K15 K16 K17 K18 K19 K20 K21 K22 K23 K24 K25 K26 K27 K28 K29 K30: library part "IM-GR Relay DPDT", "TE CONNECTIVITY  IM-GR  RELAY, DPDT, NO", Farnell ID=1175070, URL=http://si.farnell.com/te-connectivity-axicom/im06gr/relay-gull-wing-dpco-12vdc-2a/dp/1175070
P1 P3 P5: "Header, 16-Pin, Dual row", LatestRevisionDate=17-Jul-2002, LatestRevisionNote="Re-released for DXP Platform.", Publisher="Altium Limited"
P2 P4 P6: "Header, 10-Pin, Dual row", LatestRevisionDate=17-Jul-2002, LatestRevisionNote="Re-released for DXP Platform.", Publisher="Altium Limited"
P7 P8: library part "Header 4", "Header, 4-Pin", LatestRevisionDate=17-Jul-2002, LatestRevisionNote="Re-released for DXP Platform.", Publisher="Altium Limited"
P9 P10: library part "Header 6X2", "Header, 6-Pin, Dual row", LatestRevisionDate=17-Jul-2002, LatestRevisionNote="Re-released for DXP Platform.", Publisher="Altium Limited"
P11: "Header, 24-Pin, Dual row", LatestRevisionDate=17-Jul-2002, LatestRevisionNote="Re-released for DXP Platform.", Publisher="Altium Limited"
R37 R52 R77 R78 R79 R80 R81 R82 R83 R84: library part R, "R"
U1: "8-bit AVR Microcontroller, 1.8-5.5V, 8KB Flash, 64 Bytes EEPROM, 512 Bytes SRAM, 28-pin MLF, Industrial Grade (-40°C to 85°C), Pb-Free", Supplier Part Number 1=ATTINY88-MMU-ND, ComponentLink1Description="Manufacturer Link", ComponentLink1URL=http://www.atmel.com/products/avr/default.asp?, ComponentLink2Description="ATtiny48/88 Datasheet", ComponentLink2URL=http://www.atmel.com/dyn/resources/prod_documents/doc8008.pdf, ComponentLink3Description="ATtiny48/88 Summary", ComponentLink3URL=http://www.atmel.com/dyn/resources/prod_documents/8008S.pdf, ComponentLink4Description="Atmel.com Home", ComponentLink4URL=http://www.atmel.com, DatasheetVersion="revC, Mar-2009", PackageDescription="28-pad, 4x4x1.0mm Body, Pitch 0.45mm, 2.4x2.4mm Exposed Pad, Plastic Very Thin QFN Package (VQFN)", PackageReference=28M1, PackageVersion="revB, Nov-2008", Published=1-Apr-2010, Publisher="Altium Limited", Supplier 1=Digi-Key, Supplier 2=Mouser, Supplier Part Number 2=556-ATTINY88-MMU

## Via types
v1: diameter 0.45, hole 0.2, Top Layer to Bottom Layer, 300 vias
v2: diameter 0.6, hole 0.3, Top Layer to Bottom Layer, 176 vias
v3: diameter 0.5, hole 0.2, Top Layer to Bottom Layer, 34 vias
v4: diameter 0.5, hole 0.25, Top Layer to Bottom Layer, 30 vias
v5: diameter 0.66, hole 0.33, Top Layer to Bottom Layer, 4 vias
v6: diameter 5.5, hole 3, Top Layer to Bottom Layer, 4 vias

## Nets (pads, with @x,y where several pads share a name; then routed paths per layer and width w, separated by ;. In a path a pad name is that pad's centre, name@x,y a point inside that pad or via, vN(x,y) a via of type N, cw(c..) or ccw(c..) an arc to the next point about the centre after c; other vN are vias at no path point)
+3.3V: C1.2 C5.2 C12.1 C13.1 C14.1 FB1.1 LD1.5 MCP1.5 MCP1.11 MCP2.5 R37.1 R52.1 R81.1 R82.1 R83.1 R84.1 U1.3 | length 16
  Top Layer w0.2: v1(15,30.3) R81.1@15.72,30.3 R82.1@15.72,29.5 ; v1(16.1,25.4) 16.11,25.39 16.11,24.71 R84.1@16.12,24.7 R83.1@16.12,23.9 ; v1(17.3,48.2) MCP1.11@18.275,48.2 ; U1.3@18.625,34.25 19.61,34.25 C14.1@19.76,34.1 ; R52.1@19.14,18.1 v1(19.9,18.1) ; R37.1@19.14,44.4 v1(19.8,44.4) ; C14.1@19.71,34.05 C14.1@19.76,34.1 ; C14.1@19.76,34.136 C14.1@19.76,34.1 ; v1(19.8,33.4) 19.78,33.42 19.78,34.08 C14.1@19.76,34.1 ; v1(20.342,27.137) 20.342,26.535 20.358,26.518 C5.2@20.34,26.5 20.345,26.495 20.345,25.43 MCP2.5@20.35,25.425 ; MCP1.5@20.35,50.925 20.345,50.93 20.345,51.995 C1.2@20.34,52 20.364,52.024 v1(20.364,52.647)
  Top Layer w0.3: C13.1@7.15,28.4 C13.1@7.2,28.4 ; v1(8,28.1) 7.959,28.1 7.789,28.27 7.31,28.27 7.2,28.38 C13.1@7.2,28.4 ; v1(8,28.7) 7.959,28.7 7.789,28.53 7.31,28.53 7.2,28.42 C13.1@7.2,28.4 ; v1(12.1,33.6) FB1.1@12.1,34.5
  Top Layer w0.4: LD1.5@7.15,30.65 7.175,30.625 7.175,28.425 C13.1@7.2,28.4
+5: C10.1 C11.1 LD1.1 LD1.3 P7.2 P8.2 | length 27.5
  Top Layer w0.3: C11.1@5.26,34.1 5.26,33.15 LD1.3@5.25,33.15 5.25,33.025 5.777,32.498 6.623,32.498 7.15,33.025 LD1.1@7.15,33.15 ; C10.1@7.8,38.1 C10.1@7.9,38.1
  Top Layer w0.4: C11.1@5.26,34.1 5.26,35.56 C10.1@7.8,38.1
  Top Layer w0.5: P7.2@2.1,38.12 2.1,38.1 4.6,38.1 ; P8.2@2.1,48.64 4.6,48.64 4.6,38.1 ; C10.1@7.8,38.1 4.6,38.1
+12: C3.1 C4.1 C7.1 C8.1 C9.1 K1.1 K2.1 K3.1 K4.1 K5.1 K6.1 K7.1 K8.1 K9.1 K10.1 K11.1 K12.1 K13.1 K14.1 K15.1 K16.1 K17.1 K18.1 K19.1 K20.1 K21.1 K22.1 K23.1 K24.1 K25.1 K26.1 K27.1 K28.1 K29.1 K30.1 P7.3 P8.3 ULN1.9 ULN2.9 ULN3.9 ULN4.9 | length 430.4
  Top Layer w0.2: ULN3.9@28,17.075 28,16.376 28.24,16.136 C7.1@28.24,16.1 v1(28.9,16.1) ; ULN4.9@28,24.675 28,23.976 28.24,23.736 C8.1@28.24,23.7 v1(28.9,23.7) ; ULN2.9@28,42.575 28,41.876 28.24,41.636 C4.1@28.24,41.6 v1(28.9,41.6) ; ULN1.9@28,50.175 28.025,50.15 28.025,49.435 28.24,49.22 C3.1@28.24,49.2 v1(28.9,49.2)
  Top Layer w0.4: v2(35.3,20.156) K17.1@35.3,20.9 ; v2(35.3,45.656) K9.1@35.3,46.4 ; K8.1@41.5,50 v2(41.5,50.744) ; v2(44.5,20.156) K18.1@44.5,20.9 ; v2(44.5,45.656) K10.1@44.5,46.4 ; K7.1@50.7,50 v2(50.7,50.744) ; v2(53.7,20.156) K19.1@53.7,20.9 ; v2(53.7,45.656) K11.1@53.7,46.4 ; K6.1@59.9,50 v2(59.9,50.744) ; v2(62.9,20.156) K20.1@62.9,20.9 ; v2(62.9,45.656) K12.1@62.9,46.4 ; K5.1@69.1,50 v2(69.1,50.744) ; v2(72.1,20.156) K21.1@72.1,20.9 ; v2(72.1,45.656) K13.1@72.1,46.4 ; K4.1@78.3,50 v2(78.3,50.744) ; v2(81.3,20.156) K22.1@81.3,20.9 ; v2(81.3,45.656) K14.1@81.3,46.4 ; K3.1@87.5,50 v2(87.5,50.744) ; v2(90.5,20.156) K23.1@90.5,20.9 ; v2(90.5,45.656) K15.1@90.5,46.4 ; K2.1@96.7,50 v2(96.7,50.744) ; v2(99.7,20.156) K24.1@99.7,20.9 ; v2(99.7,45.656) K16.1@99.7,46.4 ; K1.1@105.9,50 v2(105.9,50.744) ; v2(111.8,8.4) K30.1@113.3,8.4 ; v2(111.8,18.1) K29.1@113.3,18.1 ; v2(111.8,27.8) K28.1@113.3,27.8 ; v2(111.8,37.5) K27.1@113.3,37.5 ; v2(111.8,47.2) K26.1@113.3,47.2 ; v2(111.8,56.8) K25.1@113.3,56.8
  Bottom Layer w0.2: v1(28.9,16.1) 31.883,16.1 32,16.217 32,19.2 ; v1(28.9,23.7) 32,23.7 ; v1(28.9,41.6) 32,41.6 ; v1(28.9,49.2) 31.9,49.2 32,49.1
  Bottom Layer w0.4: 32,44.4 32,44.5 ; 32,45 35.3,45 ; 32,51.6 32,51.4 41.5,51.4 ; 35.3,19.2 v2(35.3,20.156) ; v2(35.3,45.656) 35.3,45 ; v2(41.5,50.744) 41.5,51.4 ; v2(44.5,20.156) 44.5,19.2 44.6,19.2 ; v2(44.5,45.656) 44.5,45 ; v2(50.7,50.744) 50.7,51.4 ; 53.7,19.2 v2(53.7,20.156) ; v2(53.7,45.656) 53.7,45 ; v2(59.9,50.744) 59.9,51.4 ; 62.9,19.2 v2(62.9,20.156) ; v2(62.9,45.656) 62.9,45 ; v2(69.1,50.744) 69.1,51.4 ; 72.1,19.2 v2(72.1,20.156) ; v2(72.1,45.656) 72.1,45 ; v2(78.3,50.744) 78.3,51.4 ; 81.3,19.2 v2(81.3,20.156) ; v2(81.3,45.656) 81.3,45 ; v2(87.5,50.744) 87.5,51.4 ; 90.5,19.2 v2(90.5,20.156) ; v2(90.5,45.656) 90.5,45 ; v2(96.7,50.744) 96.7,51.4 ; v2(99.7,20.156) 99.7,19.2 99.8,19.2 ; v2(99.7,45.656) 99.7,45 90.5,45 ; v2(105.9,50.744) 105.9,51.4 96.7,51.4 ; v2(111.8,8.4) 113.3,8.4 113.3,18.1 ; v2(111.8,18.1) 113.3,18.1 ; v2(111.8,27.8) 113.3,27.8 ; v2(111.8,37.5) 113.3,37.5 ; v2(111.8,47.2) 113.3,47.2 ; v2(111.8,56.8) 113.3,56.8 113.3,47.2 ; 35.3,45 44.5,45 ; 41.5,51.4 50.7,51.4 ; 44.5,45 53.7,45 ; 50.7,51.4 59.9,51.4 ; 53.7,45 62.9,45 ; 59.9,51.4 69.1,51.4 ; 62.9,45 72.1,45 ; 69.1,51.4 78.3,51.4 ; 72.1,45 81.3,45 ; 78.3,51.4 87.5,51.4 ; 81.3,45 90.5,45 ; 87.5,51.4 96.7,51.4 ; 113.3,18.1 113.3,19.386 113.3,27.8 ; 113.3,27.8 113.3,37.5 ; 113.3,37.5 113.3,47.2
  Bottom Layer w0.8: 32,19.2 32,23.7 32,41.6 32,44.4 ; 32,19.4 35.3,19.4 41.13,19.4 41.132,19.399 41.838,19.399 41.84,19.4 44.5,19.4 53.7,19.4 62.9,19.4 72.1,19.4 ; 32,44.5 32,45 32,49.1 32,51.4 ; 72.1,19.386 81.3,19.386 90.5,19.386 113.3,19.386
  Bottom Layer w1: P7.3@2.1,40.66 4.6,40.66 4.6,51.18 ; P8.3@2.1,51.18 4.6,51.18 ; 32,51.6 32,54.914 31.414,55.5 17.186,55.5 16.6,54.914 16.6,51.786 16.014,51.2 C9.1@7.9,51.2 7.9,51.18 4.6,51.18
A1: K1.3 R1.1 R11.1 R25.2 | length 26.5
  Top Layer w0.3: R11.1@98.8,61.4 101.6,61.4 ; R1.1@105.9,62.9 105.9,61.8 105.5,61.4 101.6,61.4 ; R25.2@109.4,48.8 109.4,54 108,55.4 K1.3@105.9,55.4 104.076,55.4 103.5,55.976 103.5,59.5 101.6,61.4
A2: K16.3 R25.1 R35.1 R44.2 | length 32
  Top Layer w0.3: R44.2@98.8,35 102.1,35 ; K16.3@99.7,41 101.5,41 102.1,40.4 v2(102.1,37.6) ; v2(102.1,35.8) 102.1,35.1 102.2,35 R35.1@106.8,35 ; v2(104.9,40) 108.2,40 109.4,41.2 R25.1@109.4,47.6
  Mid Layer 1 w0.3: v2(102.1,35.8) v2(102.1,37.6) 102.1,39 103.043,39.943 104.843,39.943 v2(104.9,40)
A22: K9.3 R27.1 R38.1 R85.2 | length 99.1
  Top Layer w0.3: R27.1@35,33.5 35,34.4 35.6,35 39.1,35 ; K9.3@35.3,41 36.7,41 37.7,40 37.7,36.4 39.1,35 ; v1(40.9,34.5) 40.9,35 ; R38.1@42.4,35 40.9,35 ; R85.2@109.4,19.8 v1(109.4,26.8) ; 39.1,35 40.9,35
  Mid Layer 2 w0.3: v1(40.9,34.5) 42.8,32.6 108.7,32.6 109.4,31.9 v1(109.4,26.8)
A23: K24.3 R61.1 R69.2 R85.1 | length 26.2
  Top Layer w0.3: R69.2@98.8,9.7 102.1,9.7 ; K24.3@99.7,15.5 101.2,15.5 102.1,14.6 ; v2(102.1,10.4) 102.1,9.7 ; v2(102.1,12.1) 102.1,14.6 ; v1(102.607,14.785) 102.285,14.785 102.1,14.6 ; R61.1@106.8,9.7 102.1,9.7 ; R85.1@109.4,18.6 109.393,18.593 109.414,18.571 v1(109.414,17.481)
  Mid Layer 1 w0.3: v2(102.1,10.4) v2(102.1,12.1) ; v1(102.607,14.785) 108.189,14.785 109.414,16.009 v1(109.414,17.481)
Ac11: K1.2 P1.3 | length 17.1
  Top Layer w0.3: K1.2@105.9,53.2 v2(105.9,54)
  Bottom Layer w0.3: P1.3@103.4,69 104.7,67.7 104.7,54.8 105.47,54.03 105.87,54.03 v2(105.9,54)
Ac12: K2.2 P1.11 | length 17.5
  Top Layer w0.3: K2.2@96.7,53.2 v2(96.7,54)
  Bottom Layer w0.3: P1.11@93.24,69 94.6,67.64 94.6,64.6 95.2,64 95.2,55 96.2,54 v2(96.7,54)
Ac13: K3.2 P1.19 | length 18.7
  Top Layer w0.3: K3.2@87.5,53.2 v2(87.5,54)
  Bottom Layer w0.3: P1.19@83.08,69 84.4,67.68 84.4,55.3 85.7,54 v2(87.5,54)
Ac14: K4.2 P1.27 | length 19.1
  Top Layer w0.3: K4.2@78.3,53.2 v2(78.3,54)
  Bottom Layer w0.3: P1.27@72.92,69 74.3,67.62 74.3,62.6 75.2,61.7 75.2,55.3 76.5,54 v2(78.3,54)
Ac21: K9.2 P3.3 | length 17.9
  Top Layer w0.3: v2(35.3,42.4) K9.2@35.3,43.2
  Bottom Layer w0.3: v2(35.3,42.4) 38.4,39.3 38.4,31.6 38.9,31.1 38.9,28.72 P3.3@37.54,27.36
Ac22: K10.2 P3.11 | length 19.6
  Top Layer w0.3: v2(44.5,42.4) K10.2@44.5,43.2
  Bottom Layer w0.3: v2(44.5,42.4) 46.8,42.4 49,40.2 49,28.66 P3.11@47.7,27.36
Ac23: K11.2 P3.19 | length 18.5
  Top Layer w0.3: v2(53.7,42.4) K11.2@53.7,43.2
  Bottom Layer w0.3: v2(53.7,42.4) 54.8,42.4 57,40.2 57,31 56.6,30.6 56.6,28.62 P3.19@57.86,27.36
Ac24: K12.2 P3.27 | length 19.1
  Top Layer w0.3: v2(62.9,42.4) K12.2@62.9,43.2
  Bottom Layer w0.3: v2(62.9,42.4) 64.8,42.4 66,41.2 66,32.7 66.7,32 66.7,28.68 P3.27@68.02,27.36
Ac31: K17.2 P5.3 | length 18.9
  Top Layer w0.3: v2(35.3,16.9) K17.2@35.3,17.7
  Bottom Layer w0.3: v2(35.3,16.9) 37.2,16.9 38.542,15.558 38.542,6.858 38.9,6.5 38.9,3.36 P5.3@37.54,2
Ac32: K18.2 P5.11 | length 18.1
  Top Layer w0.3: v2(44.5,16.9) K18.2@44.5,17.7
  Bottom Layer w0.3: v2(44.5,16.9) 49,12.4 49,3.3 P5.11@47.7,2
Ac33: K19.2 P5.19 | length 18.8
  Top Layer w0.3: v2(53.7,16.9) K19.2@53.7,17.7
  Bottom Layer w0.3: v2(53.7,16.9) 55.5,16.9 57,15.4 57,6.9 56.6,6.5 56.6,3.26 P5.19@57.86,2
Ac34: K20.2 P5.27 | length 17.8
  Top Layer w0.3: v2(62.9,16.9) K20.2@62.9,17.7
  Bottom Layer w0.3: v2(62.9,16.9) 66.7,13.1 66.7,3.32 P5.27@68.02,2
Ac41: K30.2 P11.3 | length 13.7
  Top Layer w0.3: K30.2@116.5,8.4 116.5,8.9 117.3,9.7 122.4,9.7 124.5,7.6 126.76,7.6 P11.3@128,8.84
Ac42: K29.2 P11.11 | length 13.4
  Top Layer w0.3: K29.2@116.5,18.1 116.5,18.6 117.2,19.3 122.9,19.3 124.4,17.8 126.8,17.8 P11.11@128,19
Ac43: K28.2 P11.19 | length 13.3
  Top Layer w0.3: K28.2@116.5,27.8 116.5,28.3 117.2,29 123.8,29 124.9,27.9 126.74,27.9 P11.19@128,29.16
Ac44: K27.2 P11.27 | length 13
  Top Layer w0.3: K27.2@116.5,37.5 116.5,38 117.2,38.7 122.9,38.7 123.5,38.1 126.78,38.1 P11.27@128,39.32
Ac45: K26.2 P11.35 | length 12.7
  Top Layer w0.3: K26.2@116.5,47.2 116.5,47.7 117,48.2 117.2,48.4 126.92,48.4 P11.35@128,49.48
Ac46: K25.2 P11.43 | length 13.4
  Top Layer w0.3: K25.2@116.5,56.8 116.5,58 116.9,58.4 126.76,58.4 P11.43@128,59.64
Ad11: K1.4 P1.2 | length 10.5
  Top Layer w0.3: v2(105.9,56.8) K1.4@105.9,57.6
  Bottom Layer w0.3: v2(105.9,56.8) 105.92,56.82 105.92,66.44 P1.2@105.94,66.46
Ad12: K2.4 P1.10 | length 10.8
  Top Layer w0.3: v2(96.7,56.8) K2.4@96.7,57.6
  Bottom Layer w0.3: P1.10@95.78,66.46 96.7,65.54 v2(96.7,56.8)
Ad13: K3.4 P1.18 | length 11.2
  Top Layer w0.3: v2(87.5,56.8) K3.4@87.5,57.6
  Bottom Layer w0.3: P1.18@85.62,66.46 87.5,64.58 v2(87.5,56.8)
Ad14: K4.4 P1.26 | length 11.6
  Top Layer w0.3: v2(78.3,56.8) K4.4@78.3,57.6
  Bottom Layer w0.3: P1.26@75.46,66.46 75.46,63.74 77.4,61.8 77.4,57.7 v2(78.3,56.8)
Ad15: K5.4 P2.1 | length 18.8
  Top Layer w0.3: v2(69.1,56.8) K5.4@69.1,57.6
  Bottom Layer w0.3: P2.1@57.8,69 59.7,69 67.8,60.9 67.8,58.1 v2(69.1,56.8)
Ad16: K6.4 P2.5 | length 16.9
  Top Layer w0.3: v2(59.9,56.8) K6.4@59.9,57.6
  Bottom Layer w0.3: P2.5@52.72,69 54,67.72 54,64.9 56.3,62.6 57.8,62.6 59.9,60.5 v2(59.9,56.8)
Ad17: K7.4 P2.9 | length 14.3
  Top Layer w0.3: v2(50.7,56.8) K7.4@50.7,57.6
  Bottom Layer w0.3: P2.9@47.64,69 48.9,67.74 48.9,63.4 50.7,61.6 v2(50.7,56.8)
Ad18: K8.4 P2.13 | length 13.6
  Top Layer w0.3: v2(41.5,56.8) K8.4@41.5,57.6
  Bottom Layer w0.3: v2(41.5,56.8) 41.5,56.881 41.3,57.081 41.3,67.74 P2.13@42.56,69
Ad21: K9.4 P3.2 | length 10.6
  Top Layer w0.3: K9.4@35.3,38.8 v2(35.3,39.6)
  Bottom Layer w0.3: P3.2@35,29.9 35,39.219 35.3,39.519 v2(35.3,39.6)
Ad22: K10.4 P3.10 | length 10.8
  Top Layer w0.3: K10.4@44.5,38.8 v2(44.5,39.6)
  Bottom Layer w0.3: v2(44.5,39.6) 45.16,38.94 P3.10@45.16,29.9
Ad23: K11.4 P3.18 | length 11.2
  Top Layer w0.3: K11.4@53.7,38.8 v2(53.7,39.6)
  Bottom Layer w0.3: v2(53.7,39.6) 53.7,33.1 55.3,31.5 55.3,29.92 P3.18@55.32,29.9
Ad24: K12.4 P3.26 | length 11.6
  Top Layer w0.3: K12.4@62.9,38.8 v2(62.9,39.6)
  Bottom Layer w0.3: v2(62.9,39.6) 62.9,34.5 65.48,31.92 P3.26@65.48,29.9
Ad25: K13.4 P4.1 | length 18.6
  Top Layer w0.3: K13.4@72.1,38.8 v2(72.1,39.6)
  Bottom Layer w0.3: v2(72.1,39.6) 72.1,36.8 81.54,27.36 P4.1@83.14,27.36
Ad26: K14.4 P4.5 | length 15.9
  Top Layer w0.3: K14.4@81.3,38.8 v2(81.3,39.6)
  Bottom Layer w0.3: v2(81.3,39.6) 81.3,36.3 87,30.6 87,28.58 P4.5@88.22,27.36
Ad27: K15.4 P4.9 | length 14.2
  Top Layer w0.3: K15.4@90.5,38.8 v2(90.5,39.6)
  Bottom Layer w0.3: v2(90.5,39.6) 90.5,33.8 92,32.3 92,28.66 P4.9@93.3,27.36
Ad28: K16.4 P4.13 | length 12
  Top Layer w0.3: v2(99.7,38) K16.4@99.7,38.8
  Bottom Layer w0.3: P4.13@98.38,27.36 99.6,28.58 99.6,37.819 99.7,37.919 v2(99.7,38)
Ad31: K17.4 P5.2 | length 10.5
  Top Layer w0.3: K17.4@35.3,13.3 v2(35.3,14.1)
  Bottom Layer w0.3: P5.2@35,4.54 35,13.719 35.3,14.019 v2(35.3,14.1)
Ad32: K18.4 P5.10 | length 10.6
  Top Layer w0.3: K18.4@44.5,13.3 v2(44.5,14.1)
  Bottom Layer w0.3: v2(44.5,14.1) 45.16,13.44 P5.10@45.16,4.54
Ad33: K19.4 P5.18 | length 11
  Top Layer w0.3: K19.4@53.7,13.3 v2(53.7,14.1)
  Bottom Layer w0.3: v2(53.7,14.1) 53.7,8 55.32,6.38 P5.18@55.32,4.54
Ad34: K20.4 P5.26 | length 11.4
  Top Layer w0.3: K20.4@62.9,13.3 v2(62.9,14.1)
  Bottom Layer w0.3: v2(62.9,14.1) 62.9,9.1 65.4,6.6 65.4,4.62 P5.26@65.48,4.54
Ad35: K21.4 P6.1 | length 18.7
  Top Layer w0.3: K21.4@72.1,13.3 v2(72.1,14.1)
  Bottom Layer w0.3: v2(72.1,14.1) 73.5,12.7 73.5,9.5 81,2 P6.1@83.1,2
Ad36: K22.4 P6.5 | length 15.9
  Top Layer w0.3: K22.4@81.3,13.3 v2(81.3,14.1)
  Bottom Layer w0.3: v2(81.3,14.1) 81.3,11.2 86.9,5.6 86.9,3.076 87.976,2 P6.5@88.18,2
Ad37: K23.4 P6.9 | length 14
  Top Layer w0.3: K23.4@90.5,13.3 v2(90.5,14.1)
  Bottom Layer w0.3: v2(90.5,14.1) 90.5,8.4 92,6.9 92,3.26 P6.9@93.26,2
Ad38: K24.4 P6.13 | length 13.5
  Top Layer w0.3: K24.4@99.7,13.3 v2(99.7,14.1)
  Bottom Layer w0.3: P6.13@98.34,2 99.575,3.235 99.575,13.894 99.7,14.019 v2(99.7,14.1)
Ad41: K30.4 P11.2 | length 5.4
  Top Layer w0.3: K30.4@120.9,8.4 121.1,8.2 122.1,8.2 124,6.3 P11.2@125.46,6.3
Ad42: K29.4 P11.10 | length 5.4
  Top Layer w0.3: K29.4@120.9,18.1 120.9,17.8 121.1,17.6 123.5,17.6 124.501,16.599 125.321,16.599 P11.10@125.46,16.46
Ad43: K28.4 P11.18 | length 5.3
  Top Layer w0.3: K28.4@120.9,27.8 120.9,27.4 121.1,27.2 124.684,27.2 125.264,26.62 P11.18@125.46,26.62
Ad44: K27.4 P11.26 | length 4.9
  Top Layer w0.3: K27.4@120.9,37.5 121,37.5 121.1,37.4 124.583,37.4 125.203,36.78 P11.26@125.46,36.78
Ad45: K26.4 P11.34 | length 4.7
  Top Layer w0.3: K26.4@120.9,47.2 120.9,47.14 121.1,46.94 P11.34@125.46,46.94
Ad46: K25.4 P11.42 | length 4.7
  Top Layer w0.3: K25.4@120.9,56.8 120.9,56.9 121.1,57.1 P11.42@125.46,57.1
AGND1: P1.4 P1.8 P1.12 P1.16 P1.20 P1.24 P1.28 P1.32 P2.2 P2.4 P2.6 P2.8 P2.10 P2.12 P2.14 P2.16 P2.18 P2.20
  other v1: 110.7,50 108.7,50.2 110.7,51.6 37.2,52.1 38.8,52.1 40.4,52.1 42,52.1 43.6,52.1 45.2,52.1 46.8,52.1 48.4,52.1 50,52.1 51.6,52.1 53.2,52.1 54.8,52.1 56.4,52.1 58,52.1 59.6,52.1 61.2,52.1 62.8,52.1 64.4,52.1 66,52.1 67.6,52.1 69.2,52.1 70.8,52.1 72.4,52.1 74,52.1 75.6,52.1 77.2,52.1 78.8,52.1 80.4,52.1 82,52.1 83.6,52.1 85.2,52.1 86.8,52.1 88.4,52.1 90,52.1 91.6,52.1 93.2,52.1 94.8,52.1 96.4,52.1 98,52.1 99.6,52.1 101.2,52.1 102.8,52.1 104.4,52.1 106,52.1 110.7,53.2 108.7,53.6 107.6,54.8 110.7,54.8 110.7,56.4 110.7,58
AGND2: P3.4 P3.8 P3.12 P3.16 P3.20 P3.24 P3.28 P3.32 P4.2 P4.4 P4.6 P4.8 P4.10 P4.12 P4.14 P4.16 P4.18 P4.20
  other v1: 110.7,26.8 110.7,28.4 110.7,30 33.7,30.6 110.7,31.6 33.7,32.3 110.7,33.2 33.7,33.9 110.7,34.8 33.7,35.5 110.7,36.4 33.7,37.1 110.7,38 33.7,38.7 110.7,39.6 33.7,40.3 107.8,40.6 110.7,41.2 33.7,41.9 108.7,42.2 110.7,42.8 33.7,43.5 35.6,44.3 37.2,44.3 38.8,44.3 40.4,44.3 42,44.3 43.6,44.3 45.2,44.3 46.8,44.3 48.4,44.3 50,44.3 51.6,44.3 53.2,44.3 54.8,44.3 56.4,44.3 58,44.3 59.6,44.3 61.2,44.3 62.8,44.3 64.4,44.3 66,44.3 67.6,44.3 69.2,44.3 70.8,44.3 72.4,44.3 74,44.3 75.6,44.3 77.2,44.3 78.8,44.3 80.4,44.3 82,44.3 83.6,44.3 85.2,44.3 86.8,44.3 88.4,44.3 90,44.3 91.6,44.3 93.2,44.3 94.8,44.3 96.4,44.3 98,44.3 99.6,44.3 101.2,44.3 102.8,44.3 104.4,44.3 106,44.3 110.7,44.4 110.7,46 108.7,46.1 110.7,47.6
AGND3: P5.4 P5.8 P5.12 P5.16 P5.20 P5.24 P5.28 P5.32 P6.2 P6.4 P6.6 P6.8 P6.10 P6.12 P6.14 P6.16 P6.18 P6.20
  other v1: 110.7,8.4 110.7,10 110.7,11.6 110.7,13.2 110.7,14.8 110.7,16.4 110.7,18 35.6,18.6 37.2,18.6 38.8,18.6 40.4,18.6 42,18.6 43.6,18.6 45.2,18.6 46.8,18.6 48.4,18.6 50,18.6 51.6,18.6 53.2,18.6 54.8,18.6 56.4,18.6 58,18.6 59.6,18.6 61.2,18.6 62.8,18.6 64.4,18.6 66,18.6 67.6,18.6 69.2,18.6 70.8,18.6 72.4,18.6 74,18.6 75.6,18.6 77.2,18.6 78.8,18.6 80.4,18.6 82,18.6 83.6,18.6 85.2,18.6 86.8,18.6 88.4,18.6 90,18.6 91.6,18.6 93.2,18.6 94.8,18.6 96.4,18.6 98,18.6 99.6,18.6 101.2,18.6 102.8,18.6 104.4,18.6 106,18.6 110.7,20.4 110.7,22
AGND4: P11.4 P11.8 P11.12 P11.16 P11.20 P11.24 P11.28 P11.32 P11.36 P11.40 P11.44 P11.48
  other v1: 117.6,8.5 119.8,8.5 117.6,14.5 119.8,14.5 117.6,18.2 119.8,18.2 117.6,24.2 119.8,24.2 117.6,27.9 119.8,27.9 117.6,33.9 119.8,33.9 117.6,37.6 119.8,37.6 117.6,43.6 119.8,43.6 117.6,47.3 119.8,47.3 117.6,53.3 119.8,53.3 117.6,56.9 119.8,56.9 117.6,62.9 119.8,62.9
As11: P1.1 R1.2 | length 6.6
  Top Layer w0.3: R1.2@104.7,62.9 104.7,67.76 P1.1@105.94,69
As12: P1.9 R3.2 | length 6.6
  Top Layer w0.3: R3.2@94.6,62.9 94.6,67.82 P1.9@95.78,69
As13: P1.17 R5.2 | length 6.6
  Top Layer w0.3: R5.2@84.4,62.9 84.4,67.78 P1.17@85.62,69
As14: P1.25 R7.2 | length 6.6
  Top Layer w0.3: R7.2@74.3,62.9 74.3,67.84 P1.25@75.46,69
As18: P2.17 R9.2 | length 9.4
  Top Layer w0.3: R9.2@33.2,61.4 33.2,62.7 36.2,65.7 36.2,67.72 P2.17@37.48,69
As21: P3.1 R27.2 | length 6.6
  Top Layer w0.3: P3.1@35,27.36 36.2,28.56 R27.2@36.2,33.5
As22: P3.9 R29.2 | length 6.7
  Top Layer w0.3: P3.9@45.16,27.36 46.4,28.6 46.4,33.4 R29.2@46.3,33.5
As23: P3.17 R31.2 | length 6.7
  Top Layer w0.3: P3.17@55.32,27.36 56.6,28.64 56.6,33.4 R31.2@56.5,33.5
As24: P3.25 R33.2 | length 6.6
  Top Layer w0.3: P3.25@65.48,27.36 66.6,28.48 R33.2@66.6,33.5
As28: P4.17 R35.2 | length 9.5
  Top Layer w0.3: P4.17@103.46,27.36 104.8,28.7 104.8,30.9 108,34.1 R35.2@108,35
As31: P5.1 R53.2 | length 6.9
  Top Layer w0.3: P5.1@35,2 36.2,3.2 R53.2@36.2,8.4
As32: P5.9 R55.2 | length 7
  Top Layer w0.3: P5.9@45.16,2 46.4,3.24 46.4,8.3 R55.2@46.3,8.4
As33: P5.17 R57.2 | length 7
  Top Layer w0.3: P5.17@55.32,2 56.6,3.28 56.6,8.3 R57.2@56.5,8.4
As34: P5.25 R59.2 | length 6.9
  Top Layer w0.3: P5.25@65.48,2 66.7,3.22 66.7,8.3 R59.2@66.6,8.4
As38: P6.17 R61.2 | length 9.6
  Top Layer w0.3: P6.17@103.42,2 103.5,2 104.8,3.3 104.8,5.8 108,9 R61.2@108,9.7
As41: K30.3 P11.1 | length 11.7
  Top Layer w0.3: K30.3@118.7,8.4 118.7,7.9 119.7,6.9 121.9,6.9 124,4.8 126.5,4.8 P11.1@128,6.3
As42: K29.3 P11.9 | length 11.3
  Top Layer w0.3: K29.3@118.7,18.1 118.9,17.9 118.9,17.4 119.5,16.8 123,16.8 124.6,15.2 126.74,15.2 P11.9@128,16.46
As43: K28.3 P11.17 | length 11.2
  Top Layer w0.3: K28.3@118.7,27.8 118.7,27.3 119.5,26.5 123,26.5 124.2,25.3 126.68,25.3 P11.17@128,26.62
As44: K27.3 P11.25 | length 11
  Top Layer w0.3: K27.3@118.7,37.5 118.7,37 119.4,36.3 122.8,36.3 123.6,35.5 126.72,35.5 P11.25@128,36.78
As45: K26.3 P11.33 | length 10.8
  Top Layer w0.3: K26.3@118.7,47.2 118.7,46.7 119.4,46 123.5,46 123.9,45.6 126.66,45.6 P11.33@128,46.94
As46: K25.3 P11.41 | length 10.7
  Top Layer w0.3: K25.3@118.7,56.8 118.7,56.3 119.4,55.6 123,55.6 123.2,55.8 126.7,55.8 P11.41@128,57.1
AVCC: C15.1 FB1.2 U1.16 | length 2.4
  Top Layer w0.2: C15.1@13.34,35.6 U1.16@14.575,35.6
  Top Layer w0.3: FB1.2@13.3,34.5 13.34,34.5 C15.1@13.34,35.6
B1: K1.6 R2.1 R18.1 R26.2 | length 25.9
  Top Layer w0.3: R18.1@98.8,59.9 101.1,59.9 102.1,58.9 ; K1.6@99.7,55.4 101.5,55.4 102.1,56 ; v1(102.1,59.6) 102.1,58.9 ; v1(103.3,62) R2.1@103.3,62.9 ; R26.2@107.9,48.8 107.9,53.6 106.9,54.6 102.5,54.6 102.1,55 102.1,56 ; 102.1,56 102.1,58.9
  Mid Layer 1 w0.3: v1(102.1,59.6) 103.3,60.8 v1(103.3,62)
B2: K16.6 R26.1 R36.1 R51.2 | length 22.7
  Top Layer w0.3: R51.2@98.8,36.5 103.5,36.5 ; R36.1@106.8,36.5 103.5,36.5 ; R26.1@107.9,47.6 107.9,41.8 107.1,41 K16.6@105.9,41 104,41 103.5,40.5 103.5,36.5
B22: K9.6 R28.1 R45.1 R86.2 | length 97.5
  Top Layer w0.3: R28.1@37.7,33.5 v1(37.7,34.4) ; v2(39.1,36.6) 39.124,36.624 39.124,37.376 ; K9.6@41.5,41 40.2,41 39.124,39.924 39.124,37.376 ; R45.1@42.4,36.5 40,36.5 39.124,37.376 ; R86.2@107.9,19.8 R86.2@107.9,19.8 107.969,19.869 107.969,26.771 v1(107.998,26.8) v1@107.999,26.799
  Mid Layer 1 w0.3: v1(37.7,34.4) 37.7,34.8 39.07,36.17 39.07,36.57 v2(39.1,36.6)
  Mid Layer 2 w0.3: v2(39.1,36.6) 39.1,34.4 41.8,31.7 107.731,31.7 107.998,31.433 v1(107.998,26.8)
B23: K24.6 R62.1 R76.2 R86.1 | length 18.8
  Top Layer w0.3: R76.2@98.8,11.1 103.5,11.1 ; R62.1@106.8,11.1 103.5,11.1 ; R86.1@107.9,18.6 107.9,16.4 107.024,15.524 105.924,15.524 K24.6@105.9,15.5 104.4,15.5 103.5,14.6 103.5,11.1
Bc11: K1.7 P1.7 | length 17.8
  Top Layer w0.3: K1.7@99.7,53.2 v2(99.7,54)
  Bottom Layer w0.3: P1.7@98.32,69 99.6,67.72 99.6,64.8 98.2,63.4 98.2,55.1 99.27,54.03 99.67,54.03 v2(99.7,54)
Bc12: K2.7 P1.15 | length 16.8
  Top Layer w0.3: K2.7@90.5,53.2 v2(90.5,54)
  Bottom Layer w0.3: P1.15@88.16,69 89.4,67.76 89.4,55.1 v2(90.5,54)
Bc13: K3.7 P1.23 | length 17.2
  Top Layer w0.3: K3.7@81.3,53.2 v2(81.3,54)
  Bottom Layer w0.3: P1.23@78,69 79.3,67.7 79.3,59.1 79.8,58.6 79.8,55.5 v2(81.3,54)
Bc14: K4.7 P1.31 | length 17.6
  Top Layer w0.3: K4.7@72.1,53.2 v2(72.1,54)
  Bottom Layer w0.3: P1.31@67.84,69 69.1,67.74 69.1,60.3 70.7,58.7 70.7,55.4 v2(72.1,54)
Bc21: K9.7 P3.7 | length 17.4
  Top Layer w0.3: v2(41.5,42.4) K9.7@41.5,43.2
  Bottom Layer w0.3: v2(41.5,42.4) 43.2,40.7 43.2,32.4 43.9,31.7 43.9,28.64 P3.7@42.62,27.36
Bc22: K10.7 P3.15 | length 17.3
  Top Layer w0.3: v2(50.7,42.4) K10.7@50.7,43.2
  Bottom Layer w0.3: v2(50.7,42.4) 52.2,40.9 52.2,32.3 51.5,31.6 51.5,28.64 P3.15@52.78,27.36
Bc23: K11.7 P3.23 | length 17.1
  Top Layer w0.3: v2(59.9,42.4) K11.7@59.9,43.2
  Bottom Layer w0.3: v2(59.9,42.4) 59.9,41.209 61.5,39.609 61.5,31.6 61.7,31.4 61.7,28.6 P3.23@62.94,27.36
Bc24: K12.7 P3.31 | length 17.5
  Top Layer w0.3: v2(69.1,42.4) K12.7@69.1,43.2
  Bottom Layer w0.3: v2(69.1,42.4) 70.6,40.9 70.6,32.8 71.9,31.5 71.9,28.56 P3.31@73.1,27.36
Bc31: K17.7 P5.7 | length 17.2
  Top Layer w0.3: v2(41.5,16.9) K17.7@41.5,17.7
  Bottom Layer w0.3: v2(41.5,16.9) 43,15.4 43,6.7 43.9,5.8 43.9,3.28 P5.7@42.62,2
Bc32: K18.7 P5.15 | length 17.7
  Top Layer w0.3: v2(50.7,16.9) K18.7@50.7,17.7
  Bottom Layer w0.3: v2(50.7,16.9) 52.2,15.4 52.2,7.3 54.1,5.4 54.1,3.32 P5.15@52.78,2
Bc33: K19.7 P5.23 | length 17
  Top Layer w0.3: v2(59.9,16.9) K19.7@59.9,17.7
  Bottom Layer w0.3: v2(59.9,16.9) 61.7,15.1 61.7,3.24 P5.23@62.94,2
Bc34: K20.7 P5.31 | length 17.4
  Top Layer w0.3: v2(69.1,16.9) K20.7@69.1,17.7
  Bottom Layer w0.3: v2(69.1,16.9) 70.6,15.4 70.6,10.8 71.9,9.5 71.9,3.2 P5.31@73.1,2
Bc41: K30.7 P11.7 | length 14.7
  Top Layer w0.3: K30.7@116.5,14.6 116.5,15.1 117.2,15.8 122.2,15.8 123.2,14.8 123.2,13.8 124.3,12.7 126.78,12.7 P11.7@128,13.92
Bc42: K29.7 P11.15 | length 14.6
  Top Layer w0.3: K29.7@116.5,24.3 116.5,24.8 116.7,25 116.715,25 117.215,25.5 122.3,25.5 123.2,24.6 123.2,23.5 123.9,22.8 126.724,22.8 128,24.076 P11.15@128,24.08
Bc43: K28.7 P11.23 | length 13.7
  Top Layer w0.3: K28.7@116.5,34 116.5,34.5 116.7,34.7 116.782,34.7 117.282,35.2 122,35.2 124.2,33 126.76,33 P11.23@128,34.24
Bc44: K27.7 P11.31 | length 13.5
  Top Layer w0.3: K27.7@116.5,43.7 116.5,44.2 117.2,44.9 121.9,44.9 123.6,43.2 126.8,43.2 P11.31@128,44.4
Bc45: K26.7 P11.39 | length 13.4
  Top Layer w0.3: K26.7@116.5,53.4 116.5,53.9 117.2,54.6 122.4,54.6 123.7,53.3 126.74,53.3 P11.39@128,54.56
Bc46: K25.7 P11.47 | length 13.3
  Top Layer w0.3: K25.7@116.5,63 116.7,63.2 116.7,64.024 116.876,64.2 122.2,64.2 122.9,63.5 126.78,63.5 P11.47@128,64.72
Bd11: K1.5 P1.6 | length 10.9
  Top Layer w0.3: v2(99.7,56.8) K1.5@99.7,57.6
  Bottom Layer w0.3: v2(99.7,56.8) 100.86,57.96 P1.6@100.86,66.46
Bd12: K2.5 P1.14 | length 10.5
  Top Layer w0.3: v2(90.5,56.8) K2.5@90.5,57.6
  Bottom Layer w0.3: v2(90.5,56.8) 90.557,56.857 90.557,66.317 P1.14@90.7,66.46
Bd13: K3.5 P1.22 | length 10.8
  Top Layer w0.3: v2(81.3,56.8) K3.5@81.3,57.6
  Bottom Layer w0.3: P1.22@80.54,66.46 80.54,66.168 81.3,65.408 v2(81.3,56.8)
Bd14: K4.5 P1.30 | length 11.2
  Top Layer w0.3: v2(72.1,56.8) K4.5@72.1,57.6
  Bottom Layer w0.3: P1.30@70.38,66.46 70.38,61.22 72.1,59.5 v2(72.1,56.8)
Bd15: K5.5 P2.3 | length 17.9
  Top Layer w0.3: v2(62.9,56.8) K5.5@62.9,57.6
  Bottom Layer w0.3: P2.3@55.26,69 56.5,67.76 56.5,65.5 58.2,63.8 61.2,63.8 62.9,62.1 v2(62.9,56.8)
Bd16: K6.5 P2.7 | length 14.5
  Top Layer w0.3: v2(53.7,56.8) K6.5@53.7,57.6
  Bottom Layer w0.3: P2.7@50.18,69 51.5,67.68 51.5,64.6 53.7,62.4 v2(53.7,56.8)
Bd17: K7.5 P2.11 | length 13.7
  Top Layer w0.3: v2(44.5,56.8) K7.5@44.5,57.6
  Bottom Layer w0.3: v2(44.5,56.8) 43.9,57.4 43.9,67.8 P2.11@45.1,69